# Altium PCB ISL6236A.PcbDoc
Units mm, origin at the board's own origin, x right, y up, seen from the top; angles counter-clockwise.
Board outline 50 x 50 mm, 6 copper layers (L1, L2, L3, L4, L5, L6), stack 0.816 mm thick; 41 components, 27 nets, 119 pads, 102 vias.
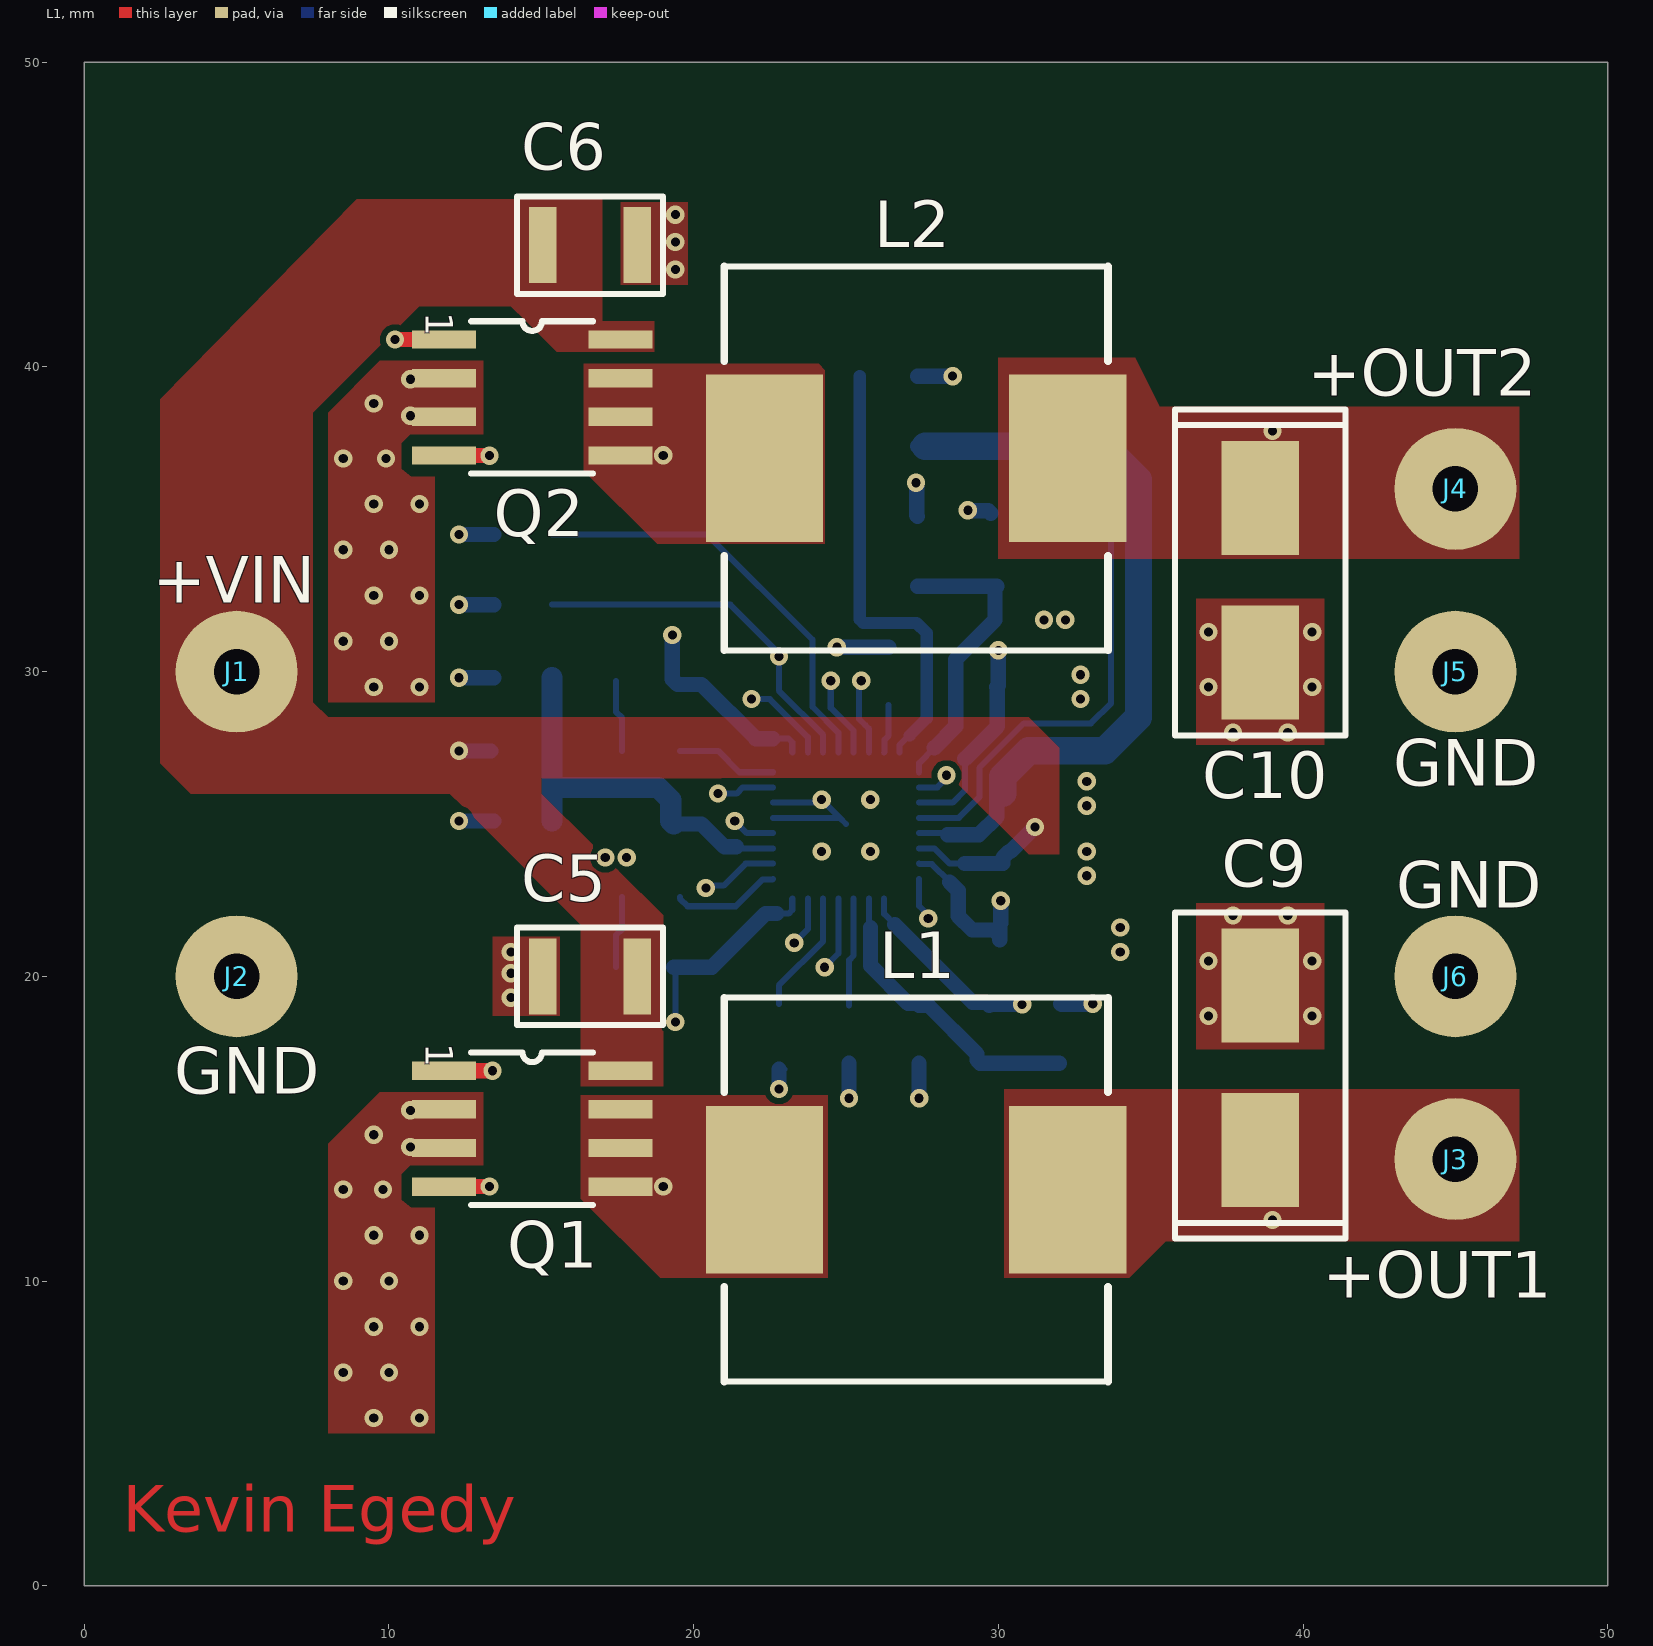
[diagram p0: L1 view]
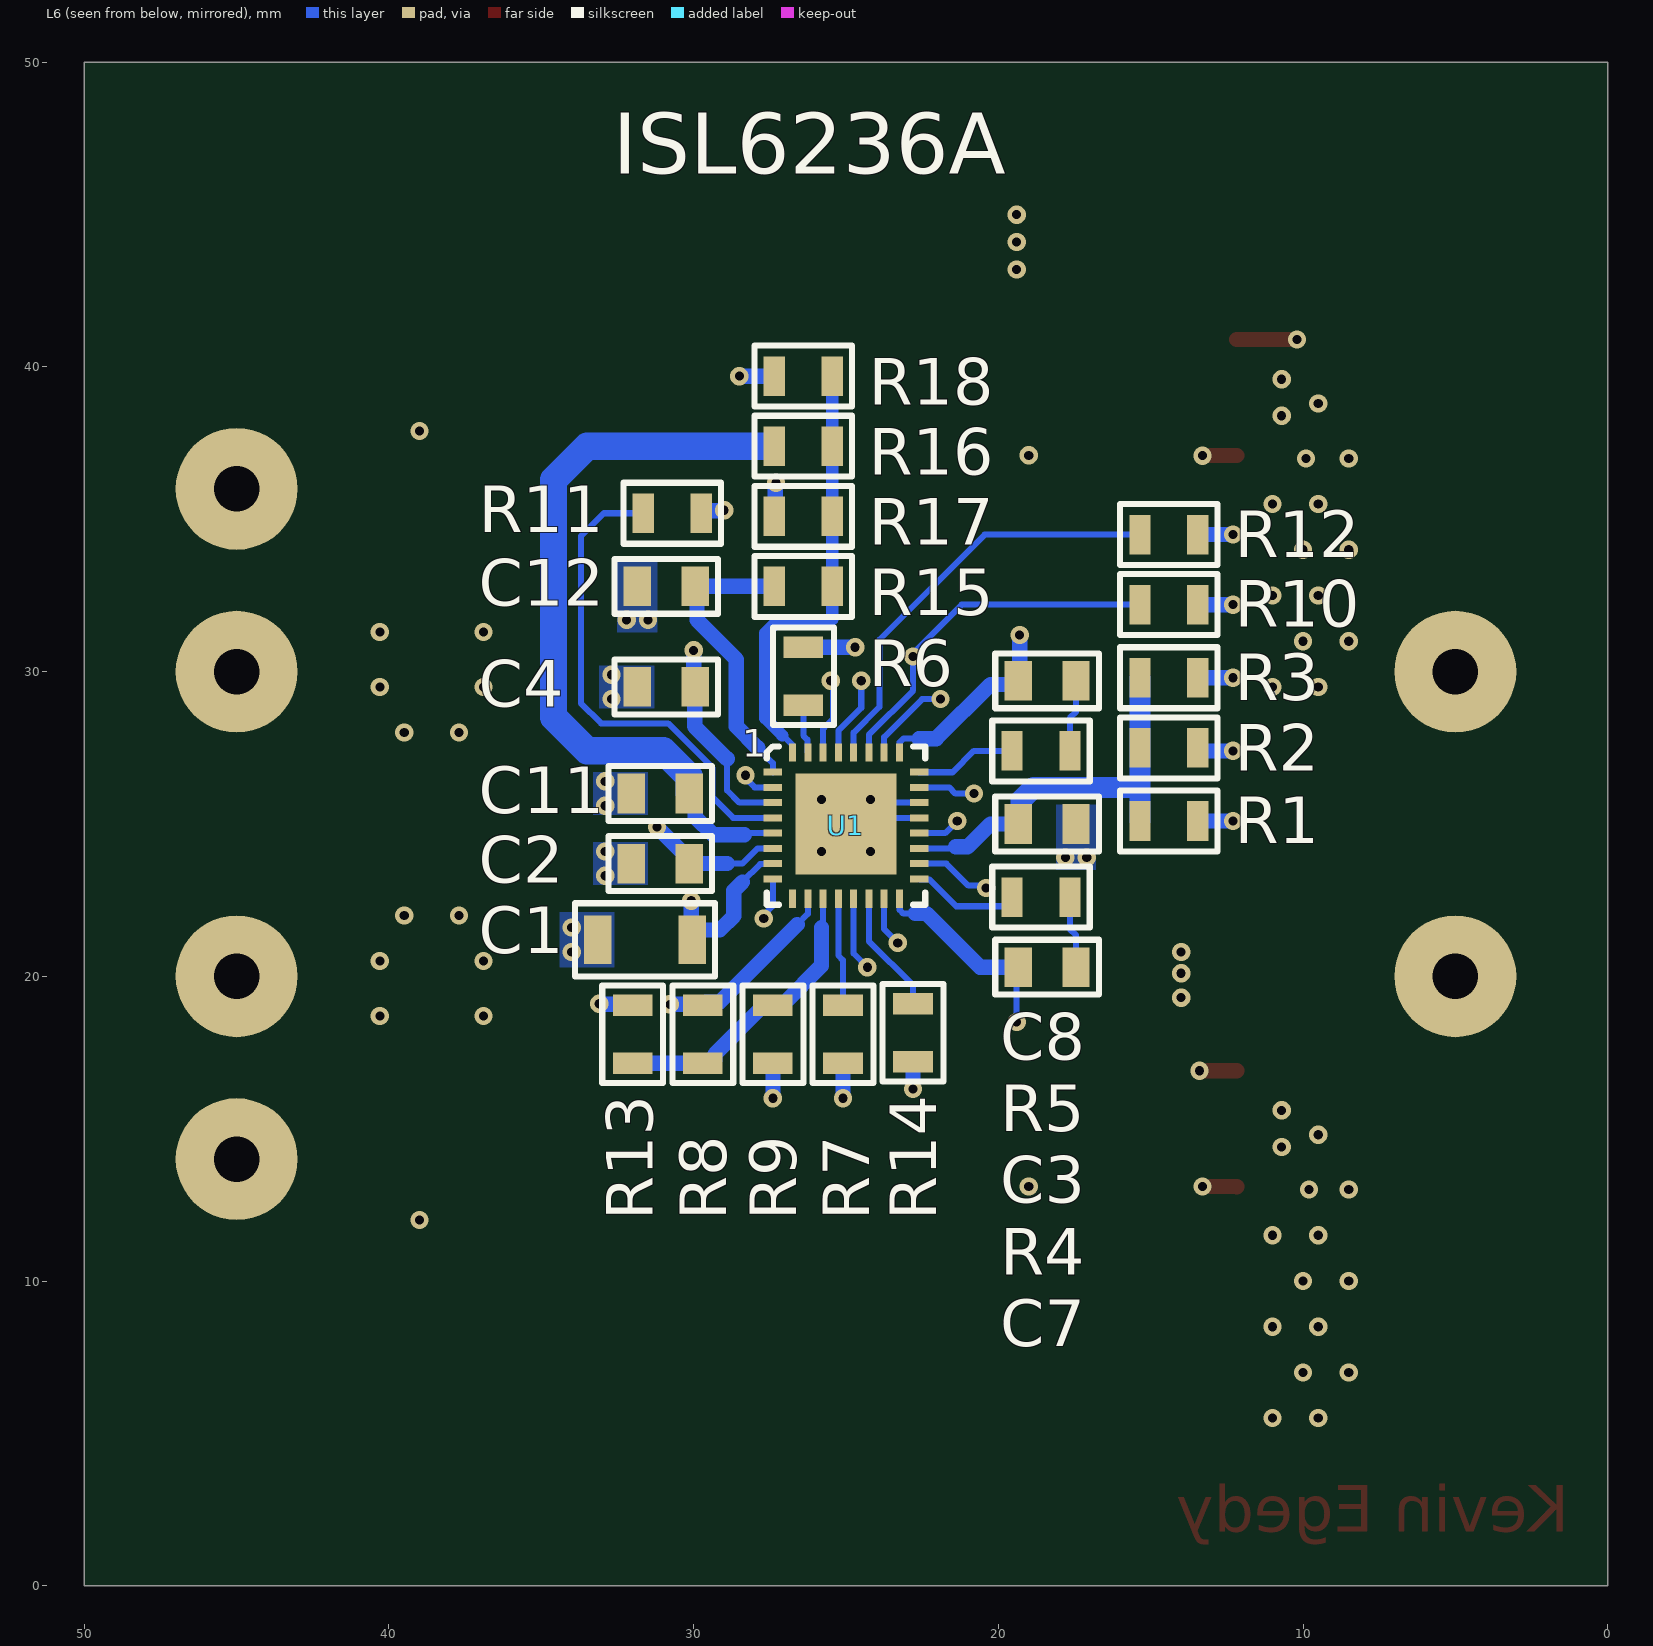
[diagram p1: L6 view, seen from below]
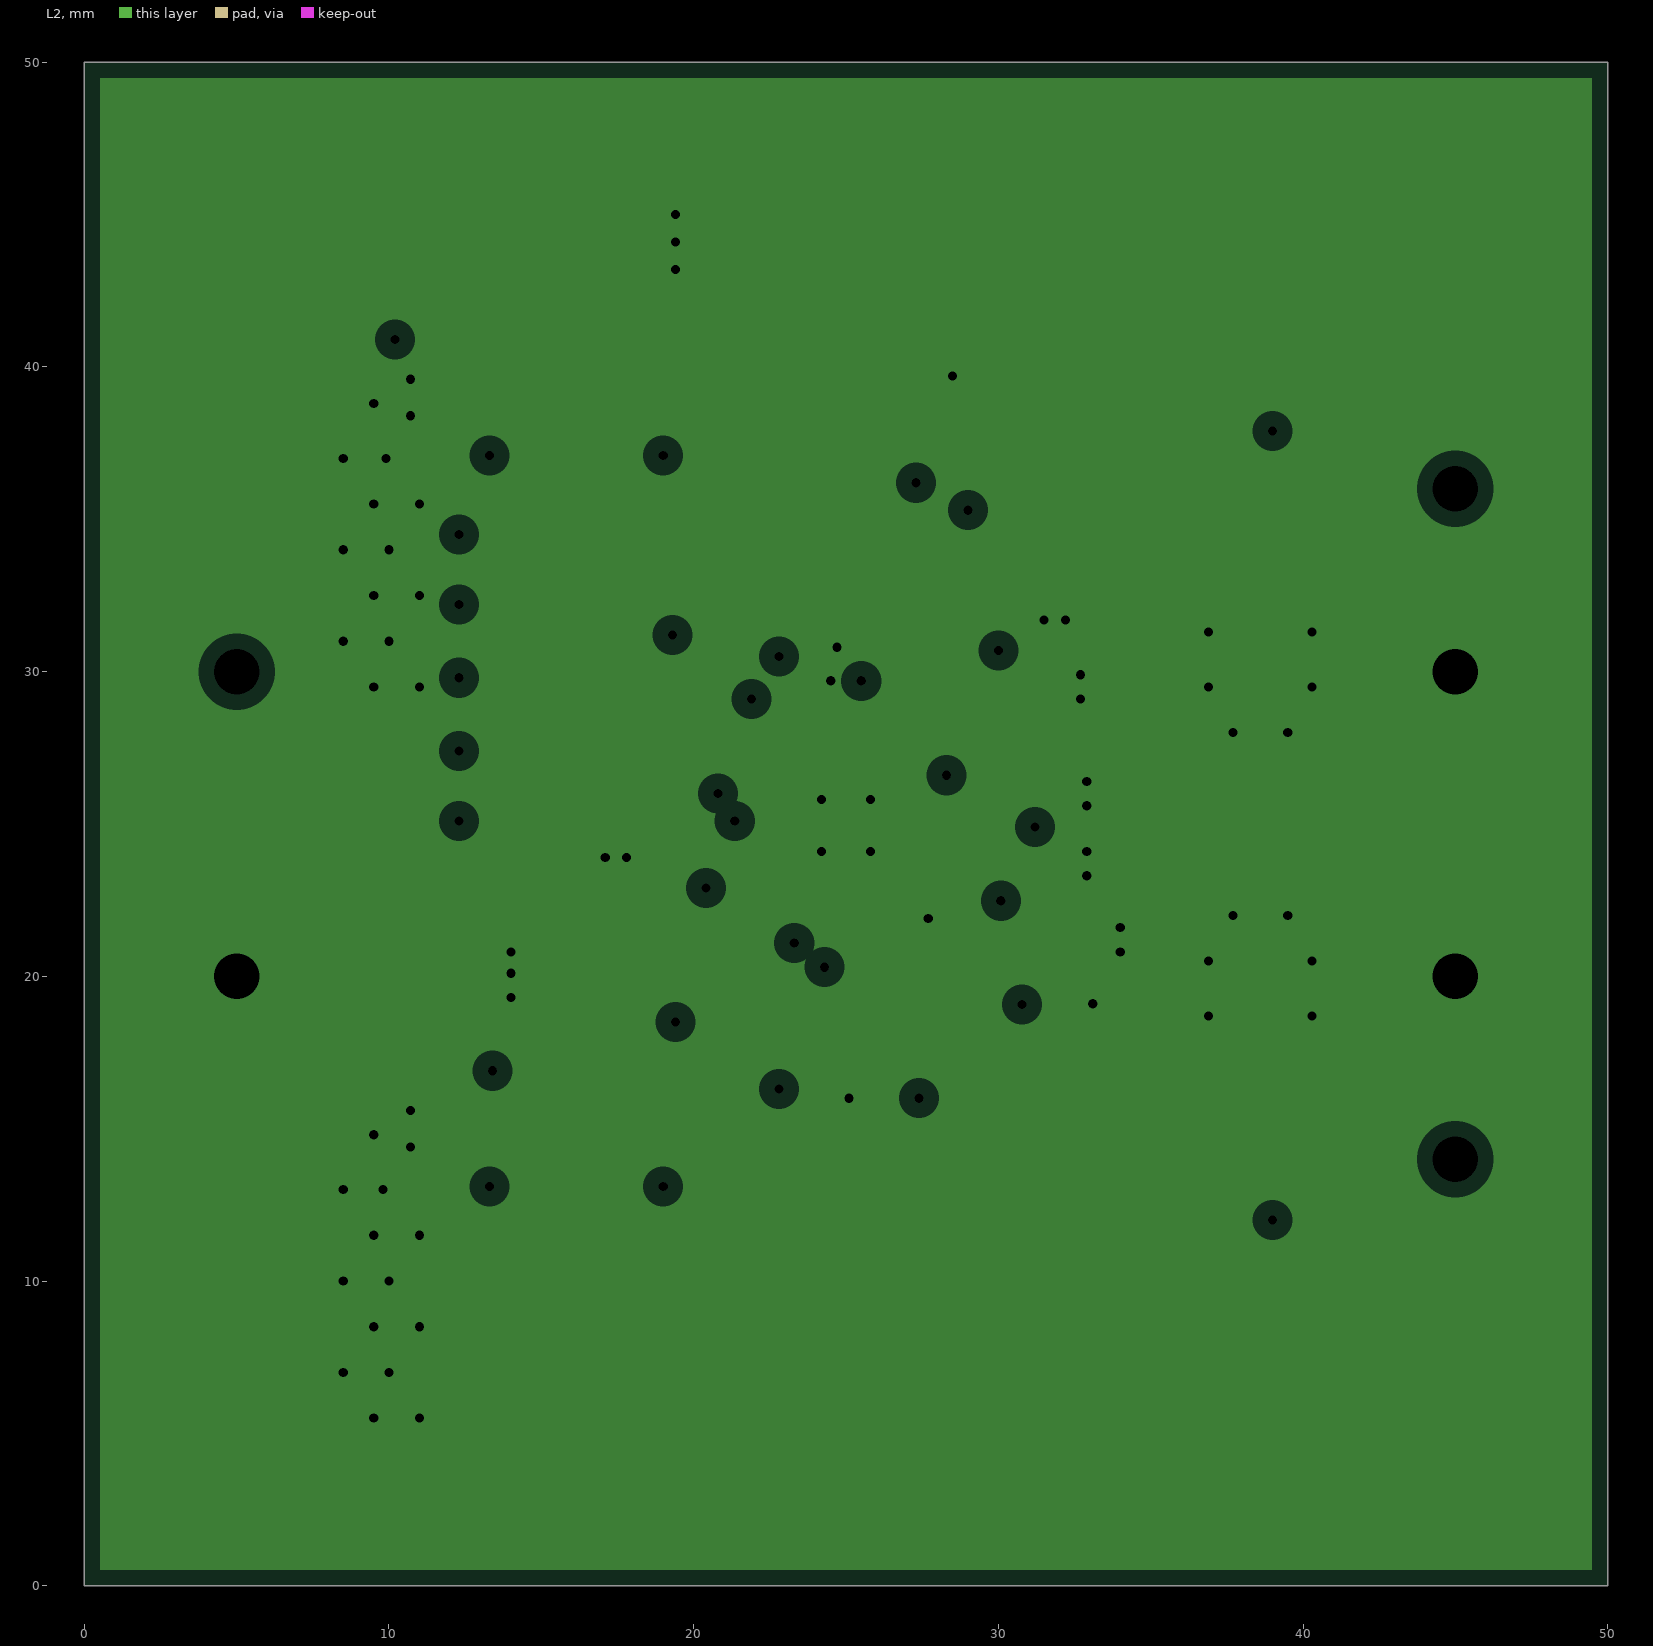
[diagram p2: L2, clearances drawn from the general rule]
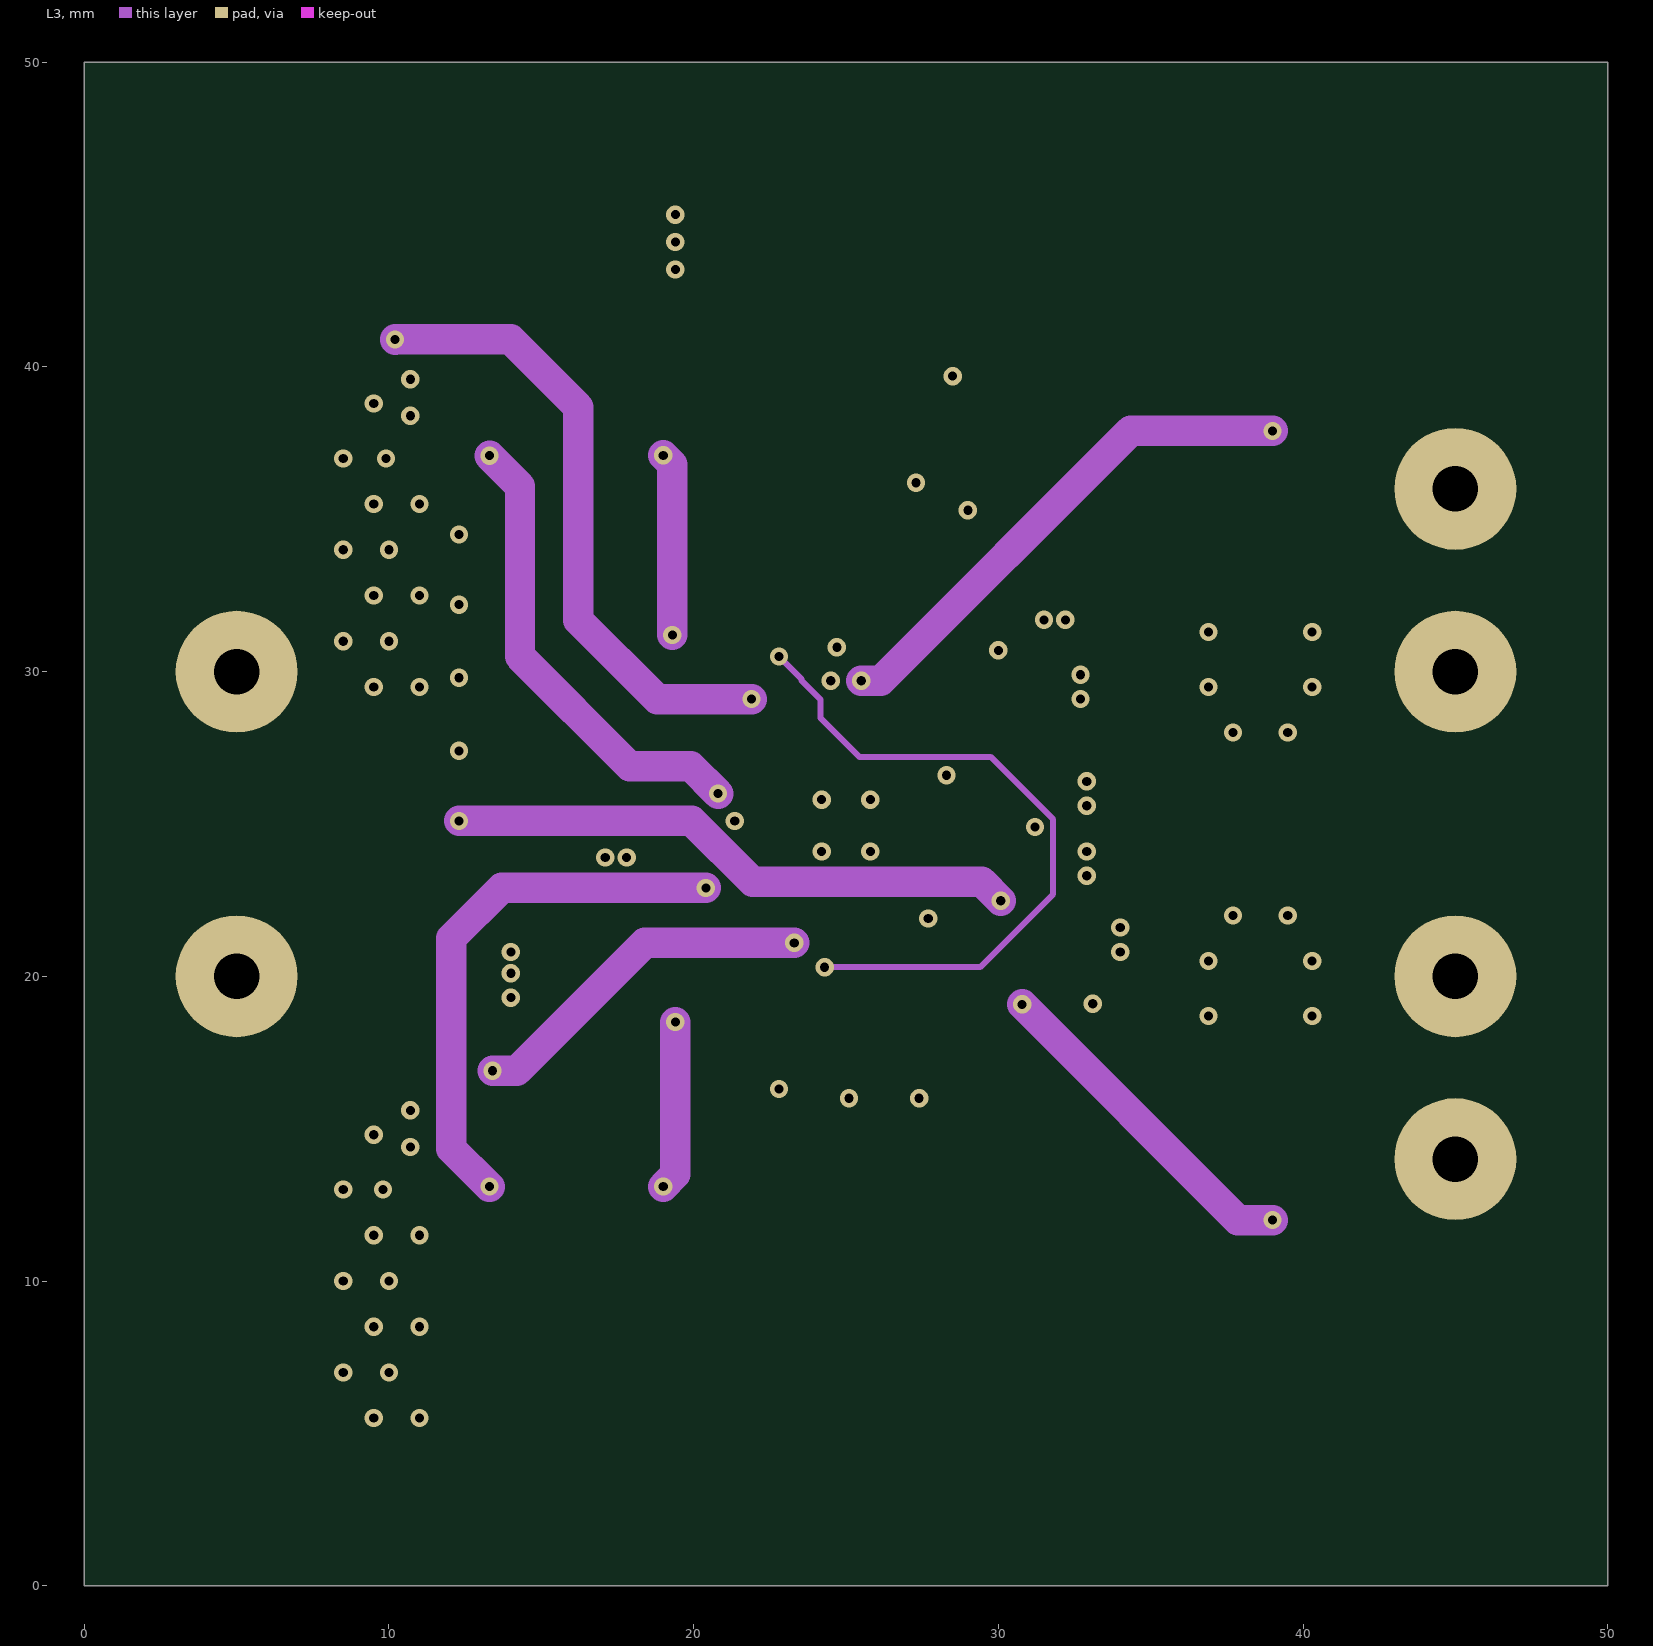
[diagram p3: L3]
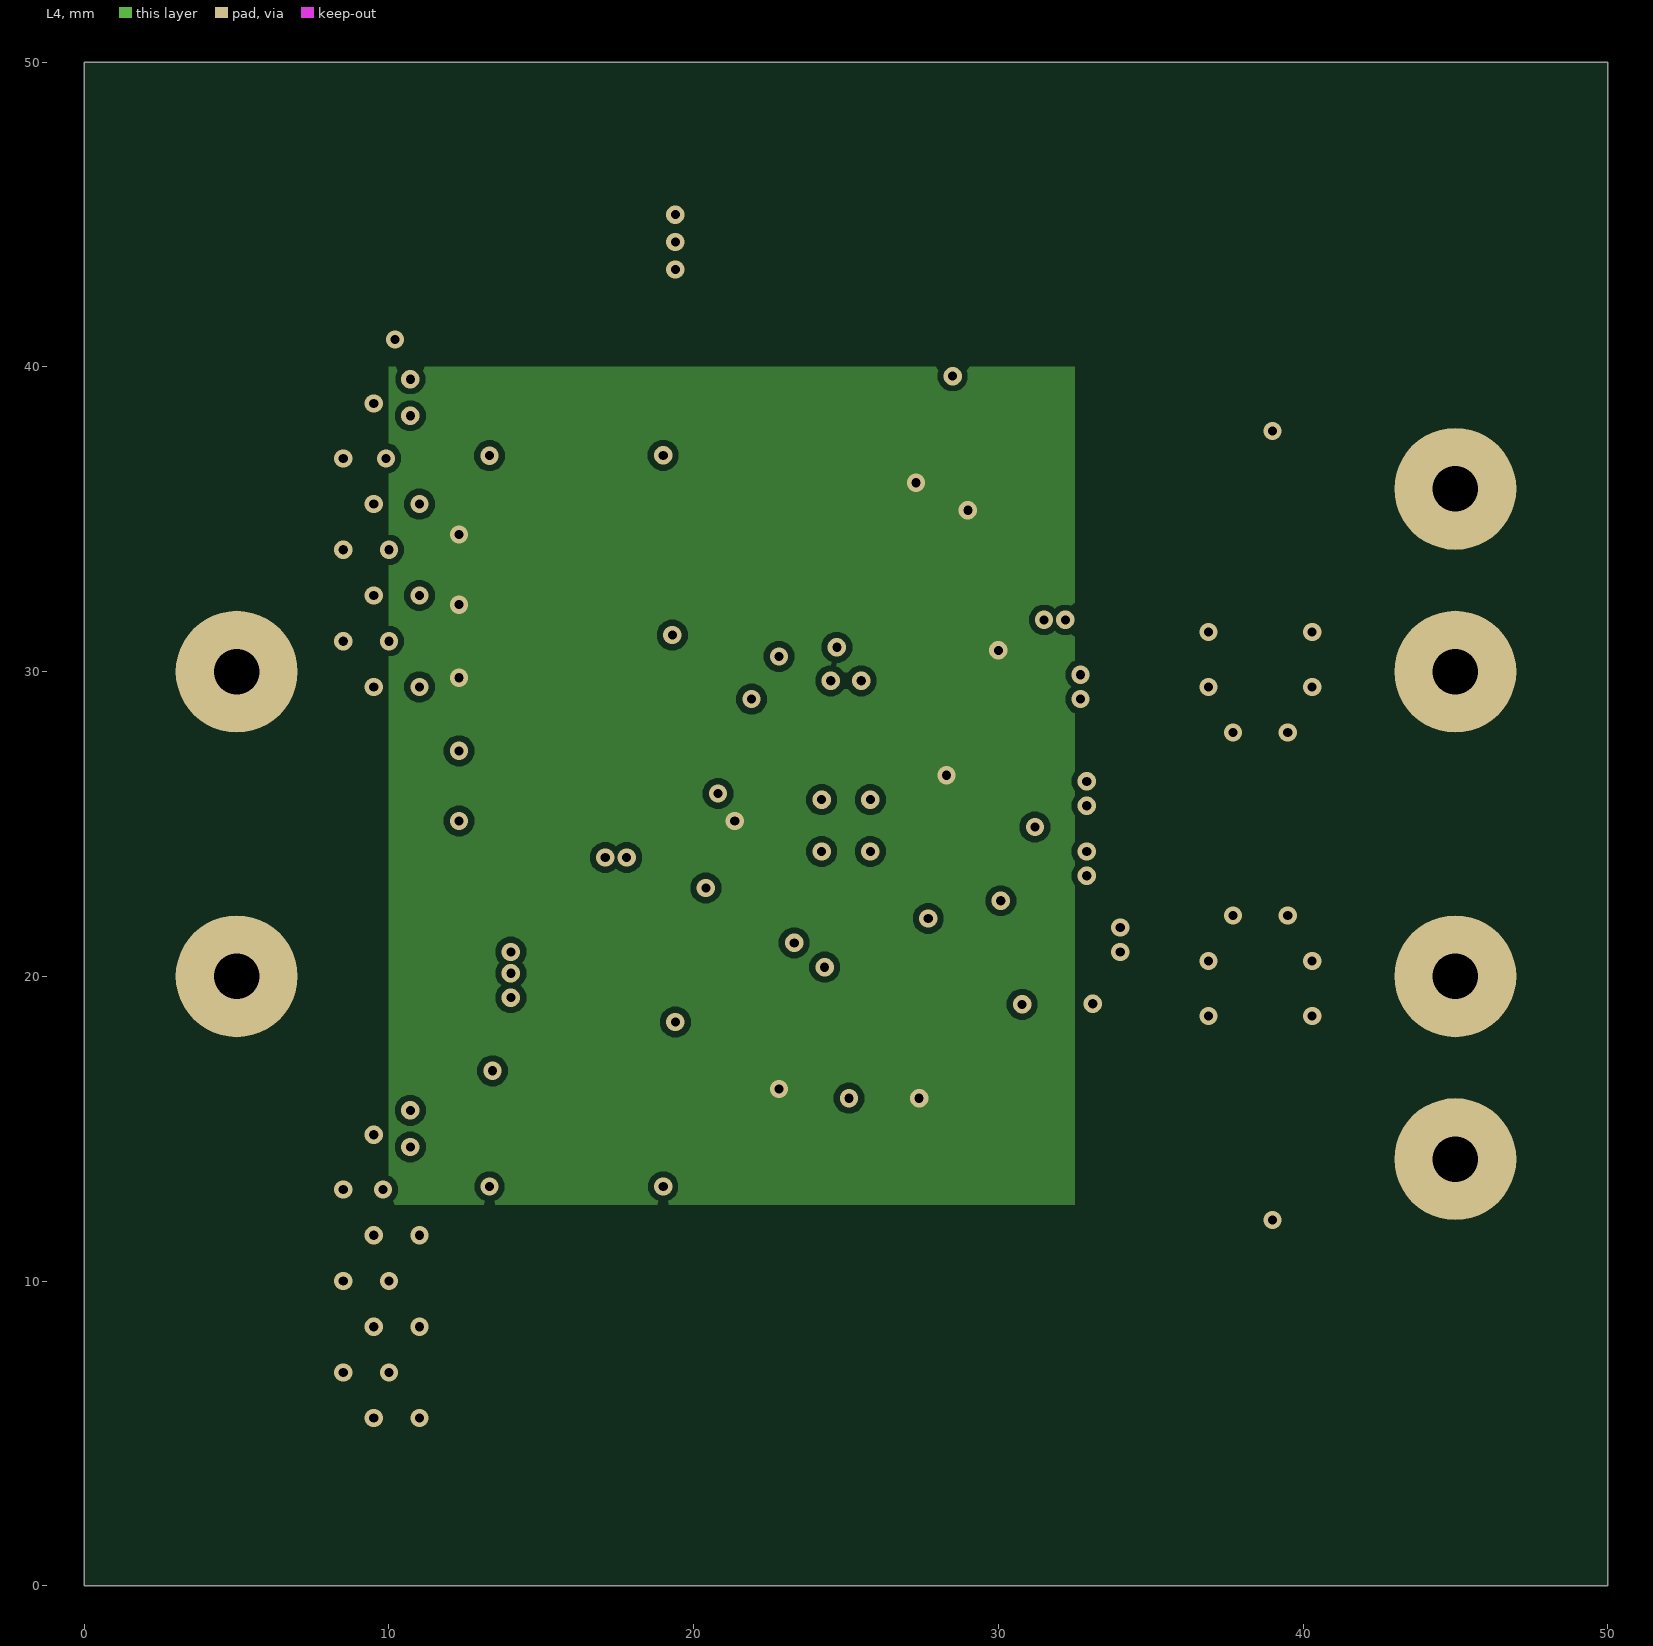
[diagram p4: L4]
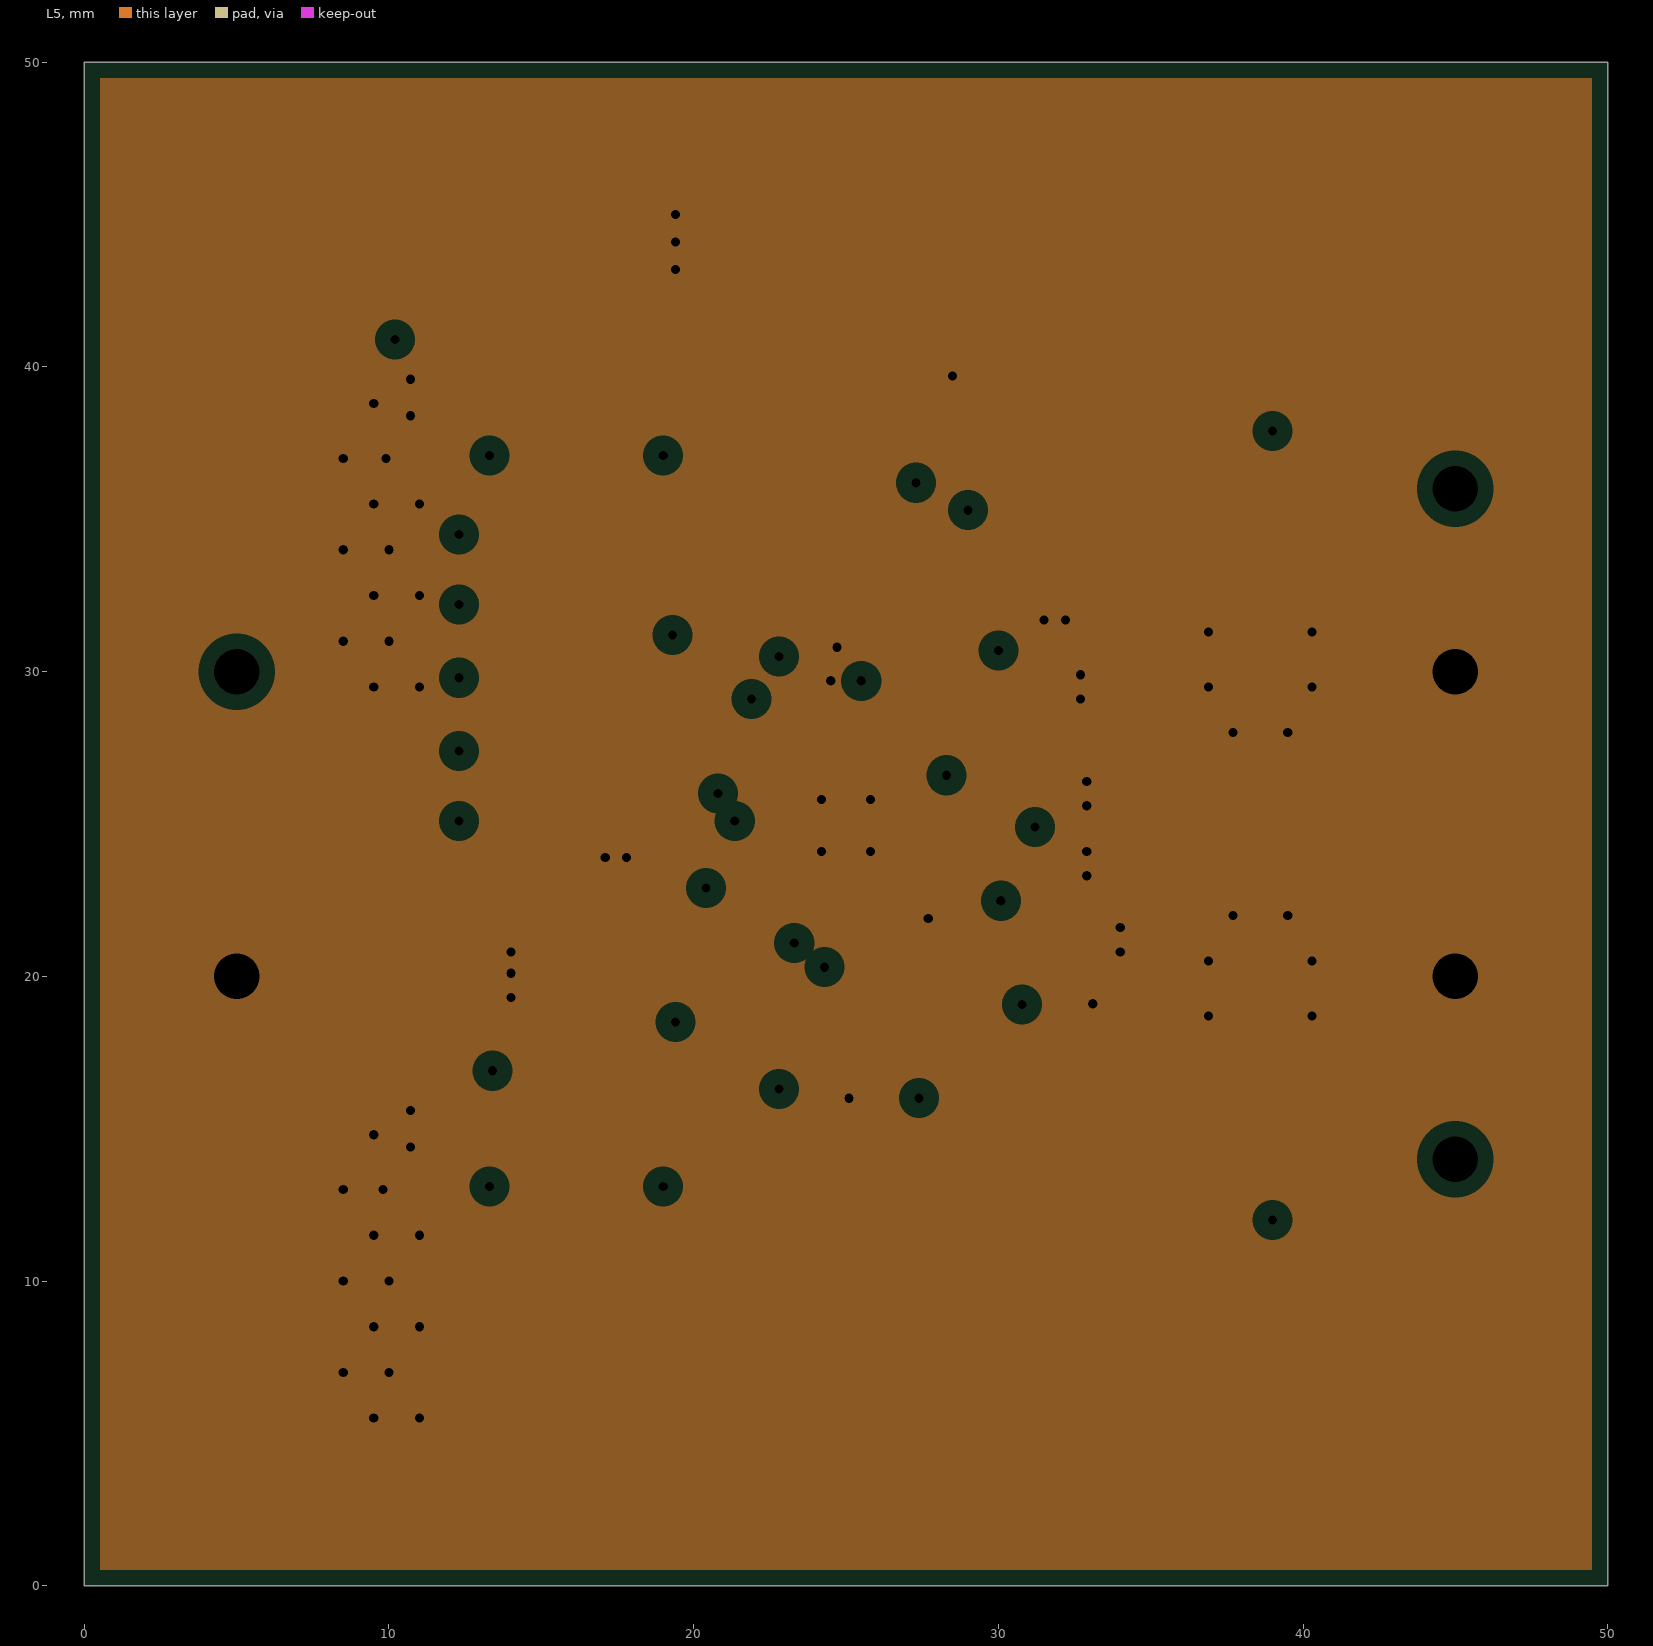
[diagram p5: L5, clearances drawn from the general rule]

## Layer stack, top to bottom
Top Solder: solder mask 0.0102, Solder Resist, Dk 3.5
L1: signal copper 0.0356
Dielectric 2: prepreg 0.0711, PP-006, Dk 4.1
L2: plane copper 0.035, net GND
Dielectric 3: prepreg 0.0711, PP-006, Dk 4.1
L3: signal copper 0.035
Dielectric 5: prepreg 0.0711, PP-006, Dk 4.1
L4: signal copper 0.035
Dielectric 4: prepreg 0.0711, PP-006, Dk 4.1
L5: plane copper 0.035, net GND
Dielectric 1: dielectric 0.32, FR-4, Dk 4.8
L6: signal copper 0.0356
Bottom Solder: solder mask 0.0102, Solder Resist, Dk 3.5

## Board outline
0,0 50,0 50,50 0,50

## Design rules (kind name [scope] priority, off if disabled: settings)
Clearance [All] p1: gap=0.2 ignorepadtopadclearanceinfootprint=FALSE
ComponentClearance [All] p1: gap=0.099 collisioncheckmode=3 verticalgap=0.099 showdistances=FALSE
MinimumSolderMaskSliver [All] p1: minsoldermaskwidth=0.1
PlaneClearance [All] p1: clearance=0.508
PlaneConnect [All] p1: pad.planeconnectstyle=Relief pad.reliefexpansion=0.508 pad.reliefentries=4 pad.reliefconductorwidth=1 pad.reliefairgap=0.5 via.planeconnectstyle=Direct via.reliefexpansion=0.508 via.reliefentries=4 via.reliefconductorwidth=0.254 via.reliefairgap=0.254
PolygonConnect [All] p1: connectstyle=Direct reliefconductorwidth=0.254 reliefentries=4 polygonreliefangle="90 Angle" airgapwidth=0.254
RoutingVias [All] p1: holewidth=0.3 width=0.6 viastyle="Through Hole" minholewidth=0.3 minwidth=0.6 maxholewidth=0.3 maxwidth=0.6
SilkToSolderMaskClearance [IsPad] p1: minsilkscreentomaskgap=0.1 clearancetoexposedcopper=TRUE
SolderMaskExpansion [All] p1: expansion=0.102 istentingtop=FALSE
Width [All] p1: maxlimit=10 minlimit=0.2 preferedwidth=0.2
25 further rules are at their usual default settings.

## Components (designator, comment, footprint, x,y, rotation, side; value= is the part's Value field where it differs from the comment)
C1 "4u7, 50V" C1206 31.6,21.2 r180 bottom
C2 "1uF, 50V" C0805 31.1,23.7 r180 bottom
C3 "1uF, 50V" C0805 18.4,25 r0 bottom
C4 "1uF, 50V" C0805 30.9,29.5 r180 bottom
C5 "10uF, 35V" C1210 16.6,20 r0 top
C6 "10uF, 35V" C1210 16.6,44 r180 top
C7 "100nF" C0805 18.4,20.3 r180 bottom
C8 "220nF" C0805 18.4,29.7 r0 bottom
C9 "330uF, 10V" 7343-43 38.6,17 r90 top
C10 "330uF, 10V" 7343-43 38.6,33 r270 top
C11 "10nF" C0805 31.1,26 r0 bottom
C12 "100nF" C0805 30.9,32.8 r0 bottom
J1 "4MMx1.5MM" PAD_WITH_HOLE_4MMx1MM5 5,30 r0 top
J2 "4MMx1.5MM" PAD_WITH_HOLE_4MMx1MM5 5,20 r0 top
J3 "4MMx1.5MM" PAD_WITH_HOLE_4MMx1MM5 45,14 r0 top
J4 "4MMx1.5MM" PAD_WITH_HOLE_4MMx1MM5 45,36 r0 top
J5 "4MMx1.5MM" PAD_WITH_HOLE_4MMx1MM5 45,30 r0 top
J6 "4MMx1.5MM" PAD_WITH_HOLE_4MMx1MM5 45,20 r0 top
L1 "3u3, DR125-3R3-R" DR125 27.3,13 r180 top
L2 "2u2, DR125-2R2-R" DR125 27.3,37 r0 top
Q1 "SI4816BDY-T1-E3" SO-8 14.7,15 r0 top
Q2 "SI4816BDY-T1-E3" SO-8 14.7,39 r0 top
R1 "0R" R0805 14.4,25.1 r180 bottom
R2 "0R" R0805 14.4,27.5 r0 bottom
R3 "10R" R0805 14.4,29.8 r180 bottom
R4 "1R" R0805 18.6,22.6 r0 bottom
R5 "1R" R0805 18.6,27.4 r180 bottom
R6 "200K" R0805 26.4,29.85 r90 bottom
R7 "200K" R0805 25.1,18.1 r90 bottom
R8 "DNF" R0805 29.7,18.1 r90 bottom
R9 "0R" R0805 27.4,18.1 r270 bottom
R10 "200K" R0805 14.4,32.2 r180 bottom
R11 "10K" R0805 30.7,35.2 r180 bottom
R12 "200K" R0805 14.4,34.5 r180 bottom
R13 "DNF" R0805 32,18.1 r270 bottom
R14 "10K" R0805 22.8,18.15 r270 bottom
R15 "DNF" R0805 26.4,32.8 r0 bottom
R16 "0R" R0805 26.4,37.4 r0 bottom
R17 "DNF" R0805 26.4,35.1 r0 bottom
R18 "DNF" R0805 26.4,39.7 r180 bottom
U1 "ISL6236AIRZ" L32.5x5B 25,24.95 r180 bottom

## Footprints (in the part's own frame and the unit in brackets; to place one, negate y for a bottom-side part, rotate by r counter-clockwise, add the part's x,y. Pads: shape width x height; smd on the part's side, far side on the other; paste and mask are expansions set on the pad)
7343-43 [mm]
  rect 3.75x2.55 smd: 1(-2.7,0) 2(2.7,0)
  silkscreen extent -5.6,-2.8 5.1,2.8
C0805 [mm]
  rect 0.9x1.3 smd: 1(-0.95,0) 2(0.95,0)
  silkscreen extent -1.7,-0.9 1.7,0.9, body extent -1,-0.6 1,0.6, height 1.21
C1206 [mm]
  rect 0.9x1.6 smd: 1(-1.55,0) 2(1.55,0)
  silkscreen extent -2.3,-1.2 2.3,1.2
C1210 [mm]
  rect 0.9x2.5 smd: 1(-1.55,0) 2(1.55,0)
  silkscreen extent -2.4,-1.6 2.4,1.6
DR125 [mm]
  rect 3.85x5.5 smd: 1(-4.975,0) 2(4.975,0)
  silkscreen extent -6.3,-6.3 6.3,6.3
L32.5x5B [mm]
  rect 0.6x0.23 smd mask+0.051: 1(-2.4,1.75) 2(-2.4,1.25) 3(-2.4,0.75) 4(-2.4,0.25) 5(-2.4,-0.25) 6(-2.4,-0.75) 7(-2.4,-1.25) 8(-2.4,-1.75) 17(2.4,-1.75) 18(2.4,-1.25) 19(2.4,-0.75) 20(2.4,-0.25) 21(2.4,0.25) 22(2.4,0.75) 23(2.4,1.25) 24(2.4,1.75)
  rect 0.23x0.6 smd mask+0.051: 9(-1.75,-2.4) 10(-1.25,-2.4) 11(-0.75,-2.4) 12(-0.25,-2.4) 13(0.25,-2.4) 14(0.75,-2.4) 15(1.25,-2.4) 16(1.75,-2.4) 25(1.75,2.4) 26(1.25,2.4) 27(0.75,2.4) 28(0.25,2.4) 29(-0.25,2.4) 30(-0.75,2.4) 31(-1.25,2.4) 32(-1.75,2.4)
  rect 3.3x3.3 smd mask+0.051: 33(0,0.05)
  silkscreen extent -2.6,-2.6 2.6,2.6
PAD_WITH_HOLE_4MMx1MM5 [mm]
  round 4 hole 1.5: 1(0,0)
R0805 [mm]
  rect 0.7x1.3 smd: 1(-0.95,0) 2(0.95,0)
  silkscreen extent -1.6,-1 1.6,1
SO-8 [mm]
  rect 2.1x0.6 smd: 1(-2.9,1.905) 2(-2.9,0.635) 3(-2.9,-0.635) 4(-2.9,-1.905) 5(2.9,-1.905) 6(2.9,-0.635) 7(2.9,0.635) 8(2.9,1.905)
  silkscreen extent -2,-2.5 2,2.5

## Part data
C1: library part C3216X5R1H475K160AB, "C Series 1206 4.7 uF 50 V ±10 % Tolerance X5R SMT Multilayer Ceramic Capacitor", Capacitance=4.7uF, Case Code (Imperial)=1206, Case Code (Metric)=3216, Dielectric=X5R, Dielectric Material=Ceramic, Manufacturer=TDK, Max Operating Temperature=85°C, Min Operating Temperature=-55°C, Package Quantity=1, Supplier Part Number 1=445-5994-1-ND, Tolerance=10%, Voltage Rating=50V, Case/Package=1206, Category="Ceramic Capacitors", ComponentLink1Description=https://datasheet.ciiva.com/24216/c3216x5r1h475k160ab-265269-24216325.pdf?src-supplier=Mouser, ComponentLink1URL=https://datasheet.ciiva.com/24216/c3216x5r1h475k160ab-265269-24216325.pdf?src-supplier=Mouser, ComponentLink2Description=https://datasheet.ciiva.com/6286/tdkmlcccaprange-6286230.pdf?src-supplier=Digi-Key, ComponentLink2URL=https://datasheet.ciiva.com/6286/tdkmlcccaprange-6286230.pdf?src-supplier=Digi-Key, ComponentLink3Description=https://datasheet.ciiva.com/6286/tdkmlcccaprange-6286233.pdf?src-supplier=Digi-Key, ComponentLink3URL=https://datasheet.ciiva.com/6286/tdkmlcccaprange-6286233.pdf?src-supplier=Digi-Key, ComponentLink4Description=https://datasheet.ciiva.com/6286/tdkmlcccaprange-6286236.pdf?src-supplier=Digi-Key, ComponentLink4URL=https://datasheet.ciiva.com/6286/tdkmlcccaprange-6286236.pdf?src-supplier=Digi-Key, Construction=Flat, Depth=1.6mm, Height=1.6mm, Lead Free="Lead Free", Length=3.2mm, Manufacturer Part Number=C3216X5R1H475K160AB, Mount="Surface Mount", Packaging="Tape and Reel", Pricing 1="1=0.82000, 10=0.60400, 50=0.48300, 100=0.41400, 500=0.32776, 1000=0.27600 (USD)", Resistor Type=Ceramic, RoHS=Yes, RoHS Compliant=Yes, Series=C, Stock 1=10961, Supplier 1=Digi-Key, Termination=SMD/SMT, Thickness=0.071inch, Voltage Rating (DC)=50V, Weight=0.000571oz, Width=1.6mm
C2 C3 C4: library part C0805C105K5RACTU, "0805 C 1uF Ceramic Multilayer Capacitor; 50 V; +125degC; X7R Dielectric; +/-10%", Capacitance=1uF, Case Code (Imperial)=0805, Case Code (Metric)=2012, Dielectric=X7R, Dielectric Material=Ceramic, Manufacturer=KEMET, Max Operating Temperature=125°C, Min Operating Temperature=-55°C, Package Quantity=1, Supplier Part Number 1=399-7409-1-ND, Tolerance=10%, Voltage=50V, Case/Package=0805, Category="Ceramic Capacitors", ComponentLink1Description=https://datasheet.ciiva.com/7842/1732744-7842192.pdf?src-supplier=Element14, ComponentLink1URL=https://datasheet.ciiva.com/7842/1732744-7842192.pdf?src-supplier=Element14, ComponentLink2Description=https://datasheet.ciiva.com/5408/kem-c1002-x7r-smd-5408569.pdf?src-supplier=Mouser, ComponentLink2URL=https://datasheet.ciiva.com/5408/kem-c1002-x7r-smd-5408569.pdf?src-supplier=Mouser, ComponentLink3Description=https://datasheet.ciiva.com/22700/1851736-22700523.pdf?src-supplier=Element14, ComponentLink3URL=https://datasheet.ciiva.com/22700/1851736-22700523.pdf?src-supplier=Element14, Construction=Flat, Contact Plating=Tin,Matte, Depth=1.25mm, Height=1.25mm, Length=2mm, Manufacturer Part Number=C0805C105K5RACTU, Mount="Surface Mount,PCB", Packaging="Tape and Reel", Pricing 1="1=0.36000, 10=0.25200, 50=0.17620, 100=0.15110, 500=0.11334, 1000=0.09570 (USD)", REACH SVHC="No SVHC", RoHS=Yes, RoHS Compliant=Yes, Series=C, Supplier 1=Digi-Key, Termination=SMD/SMT, Thickness=0.055inch, Voltage Rating=50V, Voltage Rating (DC)=50V, Width=0.049inch
C5 C6: library part C1210C106K6PACTU, "KEMET - C1210C106K6PACTU - SMD Multilayer Ceramic Capacitor, 10 &#181;F, 35 V, 1210 [3225 Metric], &#177; 10%, X5R, C Series KEMET", Capacitance=10uF, Case Code (Imperial)=1210, Case Code (Metric)=3225, Dielectric=X5R, Dielectric Material=Ceramic, Manufacturer=KEMET, Max Operating Temperature=85°C, Min Operating Temperature=-55°C, Supplier Part Number 1=399-12070-1-ND, Tolerance=10%, Voltage=35V, Case/Package=1210, Category="Ceramic Capacitors", ComponentLink1Description=http://www.farnell.com/datasheets/2741192.pdf?src-supplier=Farnell, ComponentLink1URL=http://www.farnell.com/datasheets/2741192.pdf?src-supplier=Farnell, ComponentLink2Description=http://www.alliedelec.com/m/d/f3c02ddb98afa3dd1adcb801109671e9.pdf?src-supplier=Allied+Electronics, ComponentLink2URL=http://www.alliedelec.com/m/d/f3c02ddb98afa3dd1adcb801109671e9.pdf?src-supplier=Allied+Electronics, ComponentLink3Description=https://api.kemet.com/component-edge/download/datasheet/C1210C106K6PAC7800.pdf?src-supplier=Digi-Key, ComponentLink3URL=https://api.kemet.com/component-edge/download/datasheet/C1210C106K6PAC7800.pdf?src-supplier=Digi-Key, ComponentLink4Description=http://www.kemet.com/docfinder?Partnumber=C1210C106K6PAC7800&src-supplier=Digi-Key, ComponentLink4URL=http://www.kemet.com/docfinder?Partnumber=C1210C106K6PAC7800&src-supplier=Digi-Key, ComponentLink5Description=http://www.farnell.com/datasheets/2741192.pdf?src-supplier=Newark, ComponentLink5URL=http://www.farnell.com/datasheets/2741192.pdf?src-supplier=Newark, Depth=2.5mm, Dissipation Factor=2.5%, Height=1.9mm, Lead Free="Lead Free", Length=0.126inch, Manufacturer Part Number=C1210C106K6PACTU, Mount="Surface Mount", Packaging="Tape and Reel", Pricing 1="1=0.74000, 10=0.54900, 50=0.43880, 100=0.37620, 500=0.29782, 1000=0.25079 (USD)", RoHS=Yes, RoHS Compliant=Yes, Supplier 1=Digi-Key, Termination=Solder, Thickness=0.083inch, Voltage Rating=35V, Voltage Rating (DC)=35V, Width=0.098inch
C7 C12: library part C0805C104K5RACTU, "Cap Ceramic 0.1uF 50V X7R 10% SMD 2.0 x 1.2 mm 125 C Paper T/R", Case Code (Imperial)=0805, Case Code (Metric)=2012, Dielectric=X7R, Dielectric Material=Ceramic, Manufacturer=KEMET, Max Operating Temperature=125°C, Min Operating Temperature=-55°C, Package Quantity=4000, Supplier Part Number 1=399-1170-1-ND, Tolerance=10%, Voltage=500V, Voltage Rating=50V, Capacitance=100nF, Case/Package=0805, Category="Ceramic Capacitors", ComponentLink1Description=https://datasheet.ciiva.com/32431/slceramic-chip-condensers-e-32431755.pdf?src-supplier=Distrelec, ComponentLink1URL=https://datasheet.ciiva.com/32431/slceramic-chip-condensers-e-32431755.pdf?src-supplier=Distrelec, ComponentLink2Description=https://datasheet.ciiva.com/28682/1851736-28682232.pdf?src-supplier=Element14, ComponentLink2URL=https://datasheet.ciiva.com/28682/1851736-28682232.pdf?src-supplier=Element14, ComponentLink3Description=https://datasheet.ciiva.com/18410/70095383-18410815.pdf?src-supplier=Allied+Electronics, ComponentLink3URL=https://datasheet.ciiva.com/18410/70095383-18410815.pdf?src-supplier=Allied+Electronics, ComponentLink4Description=https://datasheet.ciiva.com/14589/70095383-14589048.pdf?src-supplier=Allied+Electronics, ComponentLink4URL=https://datasheet.ciiva.com/14589/70095383-14589048.pdf?src-supplier=Allied+Electronics, Construction=Flat, Contact Plating=Tin,Matte, Depth=1.25mm, Height=0.9mm, Lead Pitch=0.75mm, Length=2mm, Manufacturer Part Number=C0805C104K5RACTU, Mount="Surface Mount,PCB", Number of Pins=2, Packaging="Tape and Reel", Pricing 1="1=0.15000, 10=0.11000, 50=0.06220, 100=0.05150, 500=0.03612, 1000=0.02991 (USD)", Radiation Hardening=No, REACH SVHC="No SVHC", RoHS=Yes, RoHS Compliant=Yes, Series=C0805C, Stock 1=4000, Supplier 1=Digi-Key, Termination=SMD/SMT, Thickness=0.035inch, Voltage Rating (DC)=50V, Width=1.2mm
C8: library part C0805C224K5RACTU, "CAP CER 0.22UF 50V X7R 0805", Case Code (Imperial)=0805, Case Code (Metric)=2012, Dielectric=X7R, Dielectric Material=Ceramic, Manufacturer=KEMET, Max Operating Temperature=125°C, Min Operating Temperature=-55°C, Package Quantity=1, Supplier Part Number 1=399-3491-2-ND, Tolerance=10%, Voltage=50V, Capacitance=220nF, Case/Package=0805, Category="Ceramic Capacitors", ComponentLink1Description=https://datasheet.ciiva.com/18193/getdatasheetpartid-304413-18193686.pdf?src-supplier=Verical, ComponentLink1URL=https://datasheet.ciiva.com/18193/getdatasheetpartid-304413-18193686.pdf?src-supplier=Verical, ComponentLink2Description=https://datasheet.ciiva.com/14589/70095383-14589519.pdf?src-supplier=Allied+Electronics, ComponentLink2URL=https://datasheet.ciiva.com/14589/70095383-14589519.pdf?src-supplier=Allied+Electronics, ComponentLink3Description=https://datasheet.ciiva.com/14603/70095383-14603247.pdf?src-supplier=Allied+Electronics, ComponentLink3URL=https://datasheet.ciiva.com/14603/70095383-14603247.pdf?src-supplier=Allied+Electronics, ComponentLink4Description=https://datasheet.ciiva.com/7842/kem-c1002-x7r-smd-7842582.pdf?src-supplier=Element14, ComponentLink4URL=https://datasheet.ciiva.com/7842/kem-c1002-x7r-smd-7842582.pdf?src-supplier=Element14, ComponentLink5Description=https://datasheet.ciiva.com/28682/1851736-28682316.pdf?src-supplier=Element14, ComponentLink5URL=https://datasheet.ciiva.com/28682/1851736-28682316.pdf?src-supplier=Element14, Construction=Flat, Depth=1.25mm, Dissipation Factor=2.5%, Height=1.1mm, Lead Pitch=0.75mm, Length=2mm, Manufacturer Part Number=C0805C224K5RACTU, Mount="Surface Mount,PCB", Packaging="Tape and Reel", Pricing 1="2500=0.03216 (USD)", Radiation Hardening=No, REACH SVHC="No SVHC", RoHS=Yes, RoHS Compliant=Yes, Series=C, Supplier 1=Digi-Key, Termination=SMD/SMT, Thickness=0.055inch, Voltage Rating=50V, Voltage Rating (DC)=50V, Width=0.049inch
C9 C10: library part T530X337M010ATE004, "Cap Tant Organic 330uF 10VDC X CASE 20% (7.3 X 4.3 X 4mm) SMD 7343-43 0.004 Ohm 125C T/R", Capacitance=330uF, Case Code (Imperial)=2917, Case Code (Metric)=7343, ESR (Equivalent Series Resistance)=4mR, Leakage Current=330uA, Manufacturer=KEMET, Max Operating Temperature=125°C, Min Operating Temperature=-55°C, Package Quantity=500, Ripple Current=8.2A, Supplier Part Number 1=399-10378-1-ND, Tolerance=20%, Voltage=10V, Case/Package=2917, Category="Polymer Capacitors", ComponentLink1Description=https://datasheet.ciiva.com/11794/0900766b80deaa91-11794477.pdf?src-supplier=RSComponents, ComponentLink1URL=https://datasheet.ciiva.com/11794/0900766b80deaa91-11794477.pdf?src-supplier=RSComponents, ComponentLink2Description=https://datasheet.ciiva.com/14593/70096008-14593753.pdf?src-supplier=Allied+Electronics, ComponentLink2URL=https://datasheet.ciiva.com/14593/70096008-14593753.pdf?src-supplier=Allied+Electronics, Construction=Flat, Depth=4.3mm, Dissipation Factor=8%, Features="General Purpose", Height=4mm, Height - Seated (Max)=0.169inch, Length=7.3mm, Life (Hours)=2000Hour, Manufacturer Part Number=T530X337M010ATE004, Mount="Surface Mount,PCB", Packaging="Tape and Reel", Polarity=Polar, Pricing 1="1=7.14000, 10=6.34700, 50=5.55360, 100=5.07760 (USD)", REACH SVHC="No SVHC", RoHS=Yes, RoHS Compliant=Yes, Series=T530, Stock 1=3, Supplier 1=Digi-Key, Termination=SMD/SMT, Voltage Rating=10V, Voltage Rating (DC)=10V, Width=4.3mm
C11: library part C0805F103K5RACTU, "KEMET - C0805F103K5RACTU - SMD Multilayer Ceramic Capacitor, FO-CAP, 10000 pF, 50 V, 0805 [2012 Metric], ± 10%, X7R", Case Code (Imperial)=0805, Case Code (Metric)=2012, Dielectric=X7R, Dielectric Material=Ceramic, Manufacturer=KEMET, Max Operating Temperature=125°C, Min Operating Temperature=-55°C, Package Quantity=4000, Supplier Part Number 1=399-5107-1-ND, Tolerance=10%, Voltage=50V, Capacitance=10nF, Case/Package=0805, Category="Ceramic Capacitors", ComponentLink1Description=https://datasheet.ciiva.com/146/docfinderpartnumber-c0805f103k5ractu-146278.pdf?src-supplier=Digi-Key, ComponentLink1URL=https://datasheet.ciiva.com/146/docfinderpartnumber-c0805f103k5ractu-146278.pdf?src-supplier=Digi-Key, ComponentLink2Description=https://datasheet.ciiva.com/7842/48829-7842407.pdf?src-supplier=Element14, ComponentLink2URL=https://datasheet.ciiva.com/7842/48829-7842407.pdf?src-supplier=Element14, ComponentLink3Description=https://datasheet.ciiva.com/7842/48829-7842408.pdf?src-supplier=Element14, ComponentLink3URL=https://datasheet.ciiva.com/7842/48829-7842408.pdf?src-supplier=Element14, Construction=Flat, Depth=1.25mm, Height=0.9mm, Lead Pitch=0.75mm, Length=2mm, Manufacturer Part Number=C0805F103K5RACTU, Mount="Surface Mount", Number of Pins=2, Packaging="Tape and Reel", Pricing 1="1=0.38000, 10=0.25800, 50=0.17200, 100=0.14620, 500=0.10322, 1000=0.09032 (USD)", Radiation Hardening=No, REACH SVHC="No SVHC", RoHS=Yes, RoHS Compliant=Yes, Series=FO-CAP, Stock 1=81291, Supplier 1=Digi-Key, Termination=SMD/SMT, Thickness=0.039inch, Voltage Rating=50V, Voltage Rating (DC)=50V, Width=1.25mm
J1 J2 J3 J4 J5 J6: library part PAD_WITH_HOLE_4MMx1MM5, "Pad with a hole 4mm x 1.5mm"
L1: library part DR125-3R3-R, "General Purpose Inductor, 3.3uH, 20%, 1 Element, Ferrite-Core, SMD, 4949", Case/Package=Nonstandard, Current Rating=9.26A, DC Resistance (DCR)=6.3mR, Inductance=3.3uH, Inductance Tolerance=20%, Manufacturer="Eaton Cooper", Max Operating Temperature=125°C, Min Operating Temperature=-40°C, Package Quantity=600, Resistor Type=Wirewound, Saturation Current=12.7A, Self Resonant Frequency=100kHz, Supplier Part Number 1=513-1529-1-ND, Category="Fixed Inductors", ComponentLink1Description=https://datasheet.ciiva.com/26858/getdatasheetpartid-251124-26858392.pdf?src-supplier=Verical, ComponentLink1URL=https://datasheet.ciiva.com/26858/getdatasheetpartid-251124-26858392.pdf?src-supplier=Verical, ComponentLink2Description=https://datasheet.ciiva.com/5707/87246-5707962.pdf?src-supplier=Farnell, ComponentLink2URL=https://datasheet.ciiva.com/5707/87246-5707962.pdf?src-supplier=Farnell, ComponentLink3Description=https://datasheet.ciiva.com/30081/4a32919a-7470-4ae0-be45-b59e3a1351ef-30081146.pdf?src-supplier=Onlinecomponents.com, ComponentLink3URL=https://datasheet.ciiva.com/30081/4a32919a-7470-4ae0-be45-b59e3a1351ef-30081146.pdf?src-supplier=Onlinecomponents.com, ComponentLink4Description=https://datasheet.ciiva.com/16295/bus-elx-ds-4315-dr-series-16295562.pdf?src-supplier=Future+Electronics, ComponentLink4URL=https://datasheet.ciiva.com/16295/bus-elx-ds-4315-dr-series-16295562.pdf?src-supplier=Future+Electronics, Core Material=Ferrite, Depth=12.5mm, Height=6mm, Height - Seated (Max)=0.236inch, Length=12.5mm, Manufacturer Part Number=DR125-3R3-R, Max DC Current=9.26A, Military Standard=Not, Mount="Surface Mount", Number of Pins=2, Packaging="Tape and Reel", Pricing 1="1=1.46000, 10=1.35100, 25=1.24720, 50=1.03960, 100=0.97710, 250=0.87320 (USD)", Radiation Hardening=No, Rated Current-Max=9.26A, REACH SVHC="No SVHC", RMS Current (Irms)=9.26A, RoHS=Yes, Series=DR, Shielding=Shielded, Stock 1=3099, Supplier 1=Digi-Key, Termination=SMD/SMT, Test Frequency=100kHz, Tolerance=20%, Weight=0.144oz, Width=0.492inch
L2: library part DR125-2R2-R, "FIXED IND 2.2UH 10.9A 4.5 MOHM", Case/Package=Nonstandard, Current Rating=10.9A, DC Resistance (DCR)=4.5mR, Inductance=2.2uH, Inductance Tolerance=20%, Manufacturer="Eaton Cooper", Max Operating Temperature=125°C, Min Operating Temperature=-40°C, Package Quantity=600, Resistor Type=Wirewound, Saturation Current=15A, Self Resonant Frequency=100kHz, Supplier Part Number 1=513-1662-1-ND, Category="Fixed Inductors", ComponentLink1Description=https://datasheet.ciiva.com/14667/0900766b8116a153-14667792.pdf?src-supplier=RSComponents, ComponentLink1URL=https://datasheet.ciiva.com/14667/0900766b8116a153-14667792.pdf?src-supplier=RSComponents, ComponentLink2Description=https://datasheet.ciiva.com/26926/getdatasheetpartid-571249-26926912.pdf?src-supplier=Verical, ComponentLink2URL=https://datasheet.ciiva.com/26926/getdatasheetpartid-571249-26926912.pdf?src-supplier=Verical, ComponentLink3Description=https://datasheet.ciiva.com/8004/87246-8004874.pdf?src-supplier=Element14, ComponentLink3URL=https://datasheet.ciiva.com/8004/87246-8004874.pdf?src-supplier=Element14, Core Material=Ferrite, DC Current=10.9A, Depth=12.5mm, Height=6mm, Height - Seated (Max)=0.236inch, Lead Free="Lead Free", Length=12.5mm, Manufacturer Part Number=DR125-2R2-R, Max DC Current=10.9A, Military Standard=Not, Mount="Surface Mount", Number of Pins=2, Packaging="Tape and Reel", Pricing 1="1=1.46000, 10=1.35100, 25=1.24720, 50=1.03960, 100=0.97710, 250=0.87320 (USD)", Radiation Hardening=No, Rated Current-Max=10.9A, REACH SVHC="No SVHC", RMS Current (Irms)=10.9A, RoHS=Yes, RoHS Compliant=Yes, Series=DR, Shielding=Shielded, Stock 1=1, Supplier 1=Digi-Key, Termination=SMD/SMT, Test Frequency=100kHz, Tolerance=20%, Weight=0.144oz, Width=0.492inch
Q1 Q2: "VISHAY         SI4816BDY-T1-E3             MOSFET, DUAL N CHANNEL, 30V, 0.0093OHM, 8.2A, SOIC-8, FULL REEL", Case/Package=SO, Continuous Drain Current (ID)=8.2A, Drain to Source Resistance=11.5mR, Drain to Source Voltage (Vdss)=30V, Drain-source On Resistance-Max=18.5mR, Gate to Source Voltage (Vgs)=20V, Manufacturer="Vishay Siliconix", Max Operating Temperature=150°C, Max Power Dissipation=1.25W, Min Operating Temperature=-55°C, Package Quantity=1, Supplier Part Number 1=SI4816BDY-T1-E3CT-ND, Threshold Voltage=1V, Category=MOSFETs, ComponentLink1Description=https://datasheet.ciiva.com/15137/getdatasheetpartid-99188-15137841.pdf?src-supplier=Verical, ComponentLink1URL=https://datasheet.ciiva.com/15137/getdatasheetpartid-99188-15137841.pdf?src-supplier=Verical, ComponentLink2Description=https://datasheet.ciiva.com/7710/si4816bd-7710449.pdf?src-supplier=Element14, ComponentLink2URL=https://datasheet.ciiva.com/7710/si4816bd-7710449.pdf?src-supplier=Element14, ComponentLink3Description=https://datasheet.ciiva.com/26789/si4816bdy-t1-e3-26789112.pdf?src-supplier=IIIC, ComponentLink3URL=https://datasheet.ciiva.com/26789/si4816bdy-t1-e3-26789112.pdf?src-supplier=IIIC, ComponentLink4Description=https://datasheet.ciiva.com/928/si4816bd-928458.pdf?src-supplier=Digi-Key, ComponentLink4URL=https://datasheet.ciiva.com/928/si4816bd-928458.pdf?src-supplier=Digi-Key, ComponentLink5Description=https://datasheet.ciiva.com/928/si4816bd-928459.pdf?src-supplier=Digi-Key, ComponentLink5URL=https://datasheet.ciiva.com/928/si4816bd-928459.pdf?src-supplier=Digi-Key, ComponentLink6Description=https://datasheet.ciiva.com/928/si4816bd-928460.pdf?src-supplier=Digi-Key, ComponentLink6URL=https://datasheet.ciiva.com/928/si4816bd-928460.pdf?src-supplier=Digi-Key, ComponentLink7Description=https://datasheet.ciiva.com/11161/si4816bd-11161496.pdf?src-supplier=Avnet, ComponentLink7URL=https://datasheet.ciiva.com/11161/si4816bd-11161496.pdf?src-supplier=Avnet, ComponentLink8Description=https://datasheet.ciiva.com/26136/si4816bd-26136990.pdf?src-supplier=Avnet+Europe, ComponentLink8URL=https://datasheet.ciiva.com/26136/si4816bd-26136990.pdf?src-supplier=Avnet+Europe, ComponentLink9Description=https://datasheet.ciiva.com/16486/si4816bd-16486349.pdf?src-supplier=Future+Electronics, ComponentLink9URL=https://datasheet.ciiva.com/16486/si4816bd-16486349.pdf?src-supplier=Future+Electronics, ComponentLink10Description=https://datasheet.ciiva.com/18448/70026226-18448822.pdf?src-supplier=Allied+Electronics, ComponentLink10URL=https://datasheet.ciiva.com/18448/70026226-18448822.pdf?src-supplier=Allied+Electronics, Element Configuration=Single, Fall Time=9ns, FET Type="2 N-Channel", Height=1.55mm, Lead Free="Lead Free", Length=5mm, Manufacturer Part Number=SI4816BDY-T1-E3, Mount="Surface Mount", Nominal Vgs=3V, Number of Channels=2, Number of Elements=2, Number of Pins=8, On-State Resistance=18.5mR, Packaging="Tape and Reel", Polarity=N-CHANNEL, Pricing 1="1=1.72000, 10=1.54500, 100=1.24180, 500=1.02024, 1000=0.87450 (USD)", Radiation Hardening=No, Rds On Max=18.5mR, REACH SVHC=Unknown, Rise Time=9ns, RoHS=Yes, RoHS Compliant=Yes, Series="LITTLE FOOT®", Stock 1=228, Supplier 1=Digi-Key, Turn-Off Delay Time=31ns, Turn-On Delay Time=13ns, Weight=0.006596oz, Width=4mm
R1 R2 R9 R16: library part AC0805JR-070RL, "Fixed Resistor, Metal Glaze/thick Film, 0.125W, 0ohm, Surface Mount, 0805", Case Code (Imperial)=0805, Case Code (Metric)=2012, Manufacturer=Yageo, Max Operating Temperature=155°C, Max Power Dissipation=125mW, Min Operating Temperature=-55°C, Resistor Type="Thick Film", Supplier Part Number 1=1978210P, Temperature Coefficient=200ppm/°C, Tolerance=5%, Voltage Rating=150V, Case/Package=0805, Category="Chip SMD Resistors", ComponentLink1Description=http://www.yageo.com/NewPortal/yageodocoutput?fileName=/pdf/R-Chip/PYu-AC_51_RoHS_L_6.pdf&src-supplier=Digi-Key, ComponentLink1URL=http://www.yageo.com/NewPortal/yageodocoutput?fileName=/pdf/R-Chip/PYu-AC_51_RoHS_L_6.pdf&src-supplier=Digi-Key, ComponentLink2Description=http://www.yageo.com/documents/recent/PYu-AC_51_RoHS_L_2.pdf?src-supplier=Mouser, ComponentLink2URL=http://www.yageo.com/documents/recent/PYu-AC_51_RoHS_L_2.pdf?src-supplier=Mouser, Features="Moisture Resistant,Automotive AEC-Q200", Height=0.024inch, Lead Free="Lead Free", Length=0.079inch, Manufacturer Part Number=AC0805JR-070RL, Number of Terminations=2, Packaging="Tape and Reel", Power Rating=125mW, Pricing 1="2500=0.00800 (GBP)", Resistance=0R, RoHS=Yes, Series=AC, Stock 1=77000, Supplier 1=RSComponents, Termination=SMD/SMT, Width=1.25mm
R3: library part AC0805FR-0710RL, "Res Thick Film 0805 10 Ohm 1% 0.125W(1/8W) ±200ppm/C Pad SMD Automotive T/R", Case Code (Imperial)=0805, Case Code (Metric)=2012, Manufacturer=Yageo, Max Operating Temperature=155°C, Max Power Dissipation=125mW, Min Operating Temperature=-55°C, Resistor Type="Thick Film", Supplier Part Number 1=YAG3690CT-ND, Temperature Coefficient=200ppm/°C, Tolerance=1%, Voltage Rating=150V, Case/Package=0805, Category="Chip SMD Resistors", ComponentLink1Description=http://www.mouser.com/ds/2/447/yageodocoutput-1111992.pdf?src-supplier=Mouser, ComponentLink1URL=http://www.mouser.com/ds/2/447/yageodocoutput-1111992.pdf?src-supplier=Mouser, ComponentLink2Description=http://components.arrow.com/part/dataview/0323_03350463?src-supplier=Arrow+Europe, ComponentLink2URL=http://components.arrow.com/part/dataview/0323_03350463?src-supplier=Arrow+Europe, ComponentLink3Description=http://www.yageo.com/NewPortal/yageodocoutput?fileName=/pdf/R-Chip/PYu-AC_51_RoHS_L_6.pdf&src-supplier=Digi-Key, ComponentLink3URL=http://www.yageo.com/NewPortal/yageodocoutput?fileName=/pdf/R-Chip/PYu-AC_51_RoHS_L_6.pdf&src-supplier=Digi-Key, ComponentLink4Description=http://www.yageo.com/documents/recent/PYu-AC_51_RoHS_L_2_revised.pdf?src-supplier=Future+Electronics, ComponentLink4URL=http://www.yageo.com/documents/recent/PYu-AC_51_RoHS_L_2_revised.pdf?src-supplier=Future+Electronics, Construction=Rectangular, Depth=1.25mm, Features="Moisture Resistant,Automotive AEC-Q200", Height=0.024inch, Lead Free="Lead Free", Length=2mm, Manufacturer Part Number=AC0805FR-0710RL, Military Standard=Not, Number of Terminations=2, Packaging="Tape and Reel", Power Rating=125mW, Pricing 1="1=0.10000, 10=0.09000, 100=0.03440, 1000=0.01515, 2500=0.01309 (USD)", Resistance=10R, RoHS=Yes, RoHS Compliant=Yes, Series=AC, Size Code=0805, Stock 1=98707, Supplier 1=Digi-Key, Termination=SMD/SMT, Width=1.25mm
R4 R5: library part AC0805FR-071RL, "Res Thick Film 0805 1 Ohm 1% 0.125W(1/8W) ±200ppm/C Pad SMD Automotive T/R", Case Code (Imperial)=0805, Case Code (Metric)=2012, Manufacturer=Yageo, Max Operating Temperature=155°C, Max Power Dissipation=125mW, Min Operating Temperature=-55°C, Resistor Type="Thick Film", Supplier Part Number 1=1978175, Temperature Coefficient=200ppm/°C, Tolerance=1%, Voltage Rating=150V, Case/Package=0805, Category="Chip SMD Resistors", ComponentLink1Description=https://datasheet.ciiva.com/12576/pyu-ac-51-rohs-l-2-12576553.pdf?src-supplier=Mouser, ComponentLink1URL=https://datasheet.ciiva.com/12576/pyu-ac-51-rohs-l-2-12576553.pdf?src-supplier=Mouser, Features="Moisture Resistant,Automotive AEC-Q200", Height=0.024inch, Lead Free="Lead Free", Length=0.079inch, Manufacturer Part Number=AC0805FR-071RL, Number of Terminations=2, Packaging="Tape and Reel", Power Rating=125mW, Pricing 1="500=0.01400, 2500=0.01000 (GBP)", Resistance=1R, RoHS=Yes, RoHS Compliant=Yes, Series=AC, Size Code=0805, Stock 1=2300, Supplier 1=RSComponents, Termination=SMD/SMT, Weight=0.000194oz, Width=0.049inch
R6 R7 R10 R12: library part AC0805FR-07200KL, "Res Thick Film 0805 200K Ohm 1% 0.125W(1/8W) ±100ppm/C Epoxy Pad SMD Automotive T/R", Case Code (Imperial)=0805, Case Code (Metric)=2012, Manufacturer=Yageo, Max Operating Temperature=155°C, Max Power Dissipation=125mW, Min Operating Temperature=-55°C, Package Quantity=5000, Resistance=200kR, Resistor Type="Thick Film", Supplier Part Number 1=YAG3706CT-ND, Temperature Coefficient=100ppm/°C, Tolerance=1%, Voltage Rating=150V, Case/Package=0805, Category="Chip SMD Resistors", ComponentLink1Description=http://www.mouser.com/ds/2/447/yageodocoutput-1111992.pdf?src-supplier=Mouser, ComponentLink1URL=http://www.mouser.com/ds/2/447/yageodocoutput-1111992.pdf?src-supplier=Mouser, ComponentLink2Description=http://www.yageo.com/NewPortal/yageodocoutput?fileName=/pdf/R-Chip/PYu-AC_51_RoHS_L_6.pdf&src-supplier=Digi-Key, ComponentLink2URL=http://www.yageo.com/NewPortal/yageodocoutput?fileName=/pdf/R-Chip/PYu-AC_51_RoHS_L_6.pdf&src-supplier=Digi-Key, ComponentLink3Description=http://www.yageo.com/documents/recent/PYu-AC_51_RoHS_L_2.pdf?src-supplier=Future+Electronics, ComponentLink3URL=http://www.yageo.com/documents/recent/PYu-AC_51_RoHS_L_2.pdf?src-supplier=Future+Electronics, Features="Moisture Resistant,Automotive AEC-Q200", Height=0.5mm, Lead Free="Lead Free", Length=2mm, Manufacturer Part Number=AC0805FR-07200KL, Number of Terminations=2, Packaging="Cut Tape", Power Rating=125mW, Pricing 1="1=0.10000, 10=0.05000, 100=0.02040, 1000=0.00917, 2500=0.00796 (USD)", RoHS=Yes, RoHS Compliant=Yes, Series=AC, Stock 1=8446, Supplier 1=Digi-Key, Technology="THICK FILM", Termination=SMD/SMT, Weight=0.000194oz, Width=1.25mm
R8 R13 R15 R17 R18: library part RES
R11 R14: library part AC0805FR-0710KL, "Res Thick Film 0805 10K Ohm 1% 0.125W(1/8W) ±100ppm/C Pad SMD Automotive T/R", Case Code (Imperial)=0805, Case Code (Metric)=2012, Manufacturer=Yageo, Max Operating Temperature=155°C, Max Power Dissipation=125mW, Min Operating Temperature=-55°C, Package Quantity=1, Resistance=10kR, Resistor Type="Thick Film", Supplier Part Number 1=311-10KLGCT-ND, Temperature Coefficient=100ppm/°C, Tolerance=1%, Voltage Rating=150V, Case/Package=0805, Category="Chip SMD Resistors", ComponentLink1Description=https://datasheet.ciiva.com/5558/pyu-ac-51-rohs-l-2-5558347.pdf?src-supplier=Mouser, ComponentLink1URL=https://datasheet.ciiva.com/5558/pyu-ac-51-rohs-l-2-5558347.pdf?src-supplier=Mouser, Construction=Rectangular, Depth=1.25mm, Features="Moisture Resistant,Automotive AEC-Q200,Anti-Sulfur", Height=0.024inch, Lead Free="Lead Free", Length=0.079inch, Manufacturer Part Number=AC0805FR-0710KL, Military Standard=Not, Number of Terminations=2, Packaging="Tape and Reel", Power Rating=125mW, Pricing 1="1=0.10000, 10=0.05000, 100=0.02040, 1000=0.00917, 2500=0.00796 (USD)", RoHS=Yes, RoHS Compliant=Yes, Series=AC, Size Code=0805, Stock 1=3, Supplier 1=Digi-Key, Termination=SMD/SMT, Width=0.049inch
U1: "IC MAIN PWR CTRLR QUAD 32-QFN", Case/Package=QFN, Manufacturer=Renesas, Max Operating Temperature=100°C, Min Operating Temperature=-40°C, Supplier Part Number 1=ISL6236AIRZ-ND, ComponentLink1Description=http://www.intersil.com/content/dam/Intersil/documents/isl6/isl6236a.pdf?src-supplier=Digi-Key, ComponentLink1URL=http://www.intersil.com/content/dam/Intersil/documents/isl6/isl6236a.pdf?src-supplier=Digi-Key, Manufacturer Part Number=ISL6236AIRZ, Mount="Surface Mount", Number of Outputs=4, Packaging=Rail/Tube, Pricing 1="1=6.46000, 10=5.80200, 25=5.48560, 100=4.75410, 250=4.51032, 500=4.04708, 1000=3.84100 (USD)", RoHS=Yes, RoHS Compliant=Yes, Stock 1=660, Supplier 1=Digi-Key

## Via types
v1: diameter 0.6, hole 0.3, L1 to L6, tented both sides, 102 vias

## Nets (pads, with @x,y where several pads share a name; then routed paths per layer and width w, separated by ;. In a path a pad name is that pad's centre, name@x,y a point inside that pad or via, vN(x,y) a via of type N, cw(c..) or ccw(c..) an arc to the next point about the centre after c; other vN are vias at no path point)
+1V5: C9.1 J3.1 L1.1 R8.2 U1.10 | length 17.4
  L3 w1: v1(30.781,19.081) 37.862,12 v1(39,12)
  L6 w0.2: U1.10 26.25,22.05 26.6,21.7 ; R8.2@29.639,19.111 R8.2
  L6 w0.5: 26.6,21.7 29.15,19.15 29.6,19.15 R8.2@29.639,19.111 ; R8.2 29.731,19.081 v1(30.781,19.081)
+1V05: C10.1 J4.1 L2.2 U1.30 | length 19.4
  L3 w1: v1(25.5,29.7) 26.139,29.7 34.339,37.9 v1(39,37.9)
  L6 w0.2: v1(25.5,29.7) 25.423,29.623 25.423,28.452 25.626,28.25 25.633,28.25 25.75,28.133 U1.30
+5V_LDO: C1.2 R1.2 U1.7 | length 25.3
  L3 w1: v1(12.3,25.1) 19.934,25.1 21.934,23.1 29.462,23.1 v1(30.081,22.481)
  L6 w0.2: U1.7 27.415,23.685 27.815,23.685 28.4,23.1
  L6 w0.5: v1(12.3,25.1) R1.2 ; 28.4,23.1 28.681,22.819 28.681,21.98 29.143,21.518 29.85,21.518 30.05,21.318 C1.2 C1.2@30.05,21.55 ; C1.2@30.081,21.75 v1(30.081,22.481)
+5V_PVCC: C3.2 R1.1 R2.2 R3.1 U1.19 | length 13.2
  L6 w0.2: 21.4,24.25 21.4,24.2 U1.19
  L6 w0.5: C3.2 20.26,25 21.01,24.25 21.4,24.25
  L6 w0.7: R1.1 15.35,26.2 ; R3.1 R2.2 15.35,26.2 ; C3.2 19.25,25.1 19.25,25.79 18.84,26.2 15.35,26.2
+5V_VCC: C4.2 R3.2 R9.2 R10.2 R11.2 R12.2 R14.2 R17.2 U1.2 U1.3 U1.20 | length 16.6
  L6 w0.2: v1(21.349,25.1) 21.749,24.7 U1.20 ; R14.2@22.8,16.95 R14.2@22.974,16.95 ; U1.3 28.5,25.7 28.9,26.1 28.9,27.138 ; U1.2 28,26.2 28.3,26.5 v1(28.3,26.6)
  L6 w0.5: v1(12.3,29.8) R3.2 ; v1(12.3,32.2) R10.2 ; v1(12.3,34.5) R12.2 ; v1(22.8,16.3) R14.2@22.8,16.95 ; v1(27.3,36.2) 27.319,36.181 27.319,35.131 R17.2 ; v1(27.4,16) R9.2 ; 28.9,27.138 29.967,28.206 C4.2@29.967,29.5 ; v1(29,35.3) 29.019,35.281 29.669,35.281 R11.2 ; C4.2 30,29.55 v1(30,30.7)
+REF: C12.1 R15.2 U1.1 | length 9.8
  L6 w0.2: U1.1 27.4,27 27.9,27.5
  L6 w0.5: R15.2 C12.1 29.895,32.745 29.895,31.695 28.6,30.4 28.6,28.2 27.9,27.5
+VIN: C2.2 C5.2 C6.2 J1.1 Q1.8 Q2.8 R2.1 U1.6 | length 5.8
  L6 w0.2: R2.1@13.35,27.4 R2.1 ; U1.6 27.9,24.2 28.4,23.7 28.9,23.7
  L6 w0.5: v1(12.3,27.4) R2.1@13.35,27.4 ; 28.9,23.7 C2.2 30.15,23.9 30.35,24.1 30.4,24.1 v1@31.181,24.881
  other v1: 31.2,24.9
+VREF3: C11.1 R16.2 U1.5 | length 25.2
  L6 w0.2: U1.5 28.285,24.7 28.335,24.65
  L6 w0.5: R16.2 R16.2@27.6,37.4 ; 28.335,24.65 29.364,24.65 29.95,25.236 29.95,26.05 C11.1@30.1,26.2
  L6 w0.9: R16.2@27.6,37.4 33.5,37.4 34.6,36.3 34.6,28.5 33.5,27.4 31,27.4 30.15,26.55 C11.1
EN1: R14.1 U1.14 | length 4.1
  L6 w0.2: R14.1 22.8,19.7 24.25,21.15 U1.14
"EN LDO": R11.1 U1.4 | length 16.3
  L6 w0.2: U1.4 28.7,25.2 29.381,25.881 29.381,26.841 30.839,28.3 33.039,28.3 33.7,28.961 33.7,34.449 32.949,35.2 R11.1
FB1: R8.1 R9.1 R13.2 U1.11 | length 9.8
  L6 w0.2: U1.11 25.75,21.65 25.8,21.6
  L6 w0.5: 25.8,21.6 25.8,20.35 27.037,19.113 R9.1@27.4,19.113 ; R9.1 27.7,19.05 29.3,17.45 29.3,17.25 29.4,17.15 R13.2
GND: C1.1 C2.1 C3.1 C4.1 C5.1 C6.1 C9.2 C10.2 C11.2 C12.2 J2.1 J5.1 J6.1 Q1.2 Q1.3 Q2.2 Q2.3 R6.2 R7.1 R13.1 R18.1 U1.8 U1.21 U1.22 U1.29 U1.33 | length 14.2
  L6 w0.2: U1.21 U1.33@24.8,25.2 ; U1.22 U1.33@24.2,25.7 ; v1(24.2,25.8) U1.33@24.8,25.2 ; v1(24.5,29.7) 24.5,28.81 25.25,28.06 U1.29 ; U1.33 U1.33@24.8,25.2 ; U1.8 27.4,22.308 27.7,22.008 v1(27.7,21.9) ; R13.1 R13.1@32.05,19.1
  L6 w0.5: v1(24.7,30.8) R6.2 ; v1(25.1,16) R7.1 ; R18.1 v1(28.5,39.7) ; R13.1@32.05,19.1 32.069,19.081 33.081,19.081 v1(33.1,19.1)
  other v1: 9.5,5.5 11,5.5 8.5,7 10,7 9.5,8.5 11,8.5 8.5,10 10,10 9.5,11.5 11,11.5 8.5,13 9.8,13 10.7,14.4 9.5,14.8 10.7,15.6 36.9,18.7 40.3,18.7 14,19.3 14,20.1 36.9,20.5 40.3,20.5 14,20.8 34,20.8 34,21.6 37.7,22 39.5,22 32.9,23.3 17.1,23.9 17.8,23.9 24.2,24.1 25.8,24.1 32.9,24.1 32.9,25.6 25.8,25.8 32.9,26.4 37.7,28 39.5,28 32.7,29.1 9.5,29.5 11,29.5 36.9,29.5 40.3,29.5 32.7,29.9 8.5,31 10,31 36.9,31.3 40.3,31.3 31.5,31.7 32.2,31.7 9.5,32.5 11,32.5 8.5,34 10,34 9.5,35.5 11,35.5 8.5,37 9.9,37 10.7,38.4 9.5,38.8 10.7,39.6 19.4,43.2 19.4,44.1 19.4,45
LGATE1: Q1.4 U1.18 | length 21.4
  L1 w0.5: Q1.4@12.173,13.095 12.176,13.097 13.297,13.097 v1(13.3,13.1)
  L3 w1: v1(13.3,13.1) 13.29,13.1 12.046,14.344 12.046,21.246 13.7,22.9 v1(20.4,22.9)
  L6 w0.2: v1(20.4,22.9) 20.477,22.977 20.985,22.977 21.708,23.7 U1.18
LGATE2: Q2.4 U1.23 | length 18.3
  L1 w0.5: Q2.4@12.173,37.095 v1@13.195,37.095
  L3 w1: v1(13.3,37.09) 14.3,36.09 14.3,30.5 17.9,26.9 19.9,26.9 v1(20.8,26)
  L6 w0.2: v1(20.8,26) 21.408,26 21.608,26.2 U1.23
NetC7_2: C7.2 R4.1 | length 2.4
  L6 w0.2: C7.2 17.45,21.35 17.65,21.55 R4.1
NetC8_1: C8.1 R5.2 | length 2.4
  L6 w0.2: C8.1 17.45,28.686 17.65,28.486 R5.2
NetR4_2: R4.2 U1.17 | length 3.6
  L6 w0.2: R4.2 19.55,22.55 19.8,22.3 21.38,22.3 22.265,23.185 22.585,23.185 U1.17
NetR5_1: R5.1 U1.24 | length 3.3
  L6 w0.2: R5.1 20.8,27.4 21.5,26.7 U1.24
NetR6_1: R6.1 U1.31 | length 1.6
  L6 w0.2: U1.31 26.265,27.365 26.265,27.765 26.4,27.9 R6.1
NetR7_2: R7.2 U1.12 | length 3.6
  L6 w0.2: R7.2 25.1,20.534 25.25,20.684 U1.12
PHASE1: C7.1 L1.2 Q1.5 Q1.6 Q1.7 U1.16 | length 12.4
  L3 w1: v1(19,13.1) 19.4,13.5 v1(19.4,18.5)
  L6 w0.2: C7.1 19.4,20.25 v1(19.4,18.5) ; 22.729,22.06 23.118,22.06 23.235,22.177 23.235,22.535 U1.16
  L6 w0.5: C7.1 20.6,20.3 ; 20.602,20.3 22.362,22.06 22.729,22.06
PHASE2: C8.2 L2.1 Q2.5 Q2.6 Q2.7 U1.25 | length 12.6
  L3 w1: v1(19,37.1) 19.3,36.8 v1@19.3,31.217
  L6 w0.2: C8.2@19.3,29.75 C8.2 ; 22.6,27.8 23.118,27.8 23.235,27.683 23.235,27.365 U1.25
  L6 w0.5: C8.2@19.3,29.75 v1(19.3,31.2) ; C8.2 19.468,29.582 20.257,29.582 22.039,27.8 22.6,27.8
POK1: R10.1 U1.13 U1.27 | length 36.8
  L3 w0.2: v1(22.8,30.5) 23.545,29.755 23.545,29.707 24.159,29.093 24.159,28.482 25.441,27.2 29.749,27.2 31.8,25.149 31.8,22.7 29.4,20.3 v1(24.3,20.3)
  L6 w0.2: R10.1 21.2,32.2 v1@22.8,30.6 ; v1(22.8,30.5) 22.8,29.379 24.25,27.929 U1.27 ; v1(24.3,20.3) 24.75,20.75 U1.13
POK2: R12.1 U1.28 | length 14
  L6 w0.2: R12.1 20.449,34.5 23.9,31.049 23.9,28.844 24.75,27.994 U1.28
REFIN2: R15.1 R16.1 R17.1 R18.2 U1.32 | length 14.7
  L6 w0.2: U1.32 26.75,27.59 27.069,27.91 27.09,27.91
  L6 w0.4: R18.2 R16.1 R17.1 R15.1 25.45,31.717 25.567,31.6 27.316,31.6 27.65,31.266 27.65,28.469 27.09,27.91
UGATE1: Q1.1 U1.15 | length 14.5
  L1 w0.5: Q1.1@12.173,16.905 12.176,16.903 13.397,16.903 v1(13.4,16.9)
  L3 w1: v1(13.4,16.9) 14.2,16.9 18.4,21.1 v1(23.3,21.1)
  L6 w0.2: v1(23.3,21.1) 23.75,21.55 U1.15
UGATE2: Q2.1 U1.26 | length 25.5
  L1 w0.5: v1(10.2,40.9) 10.202,40.902 12.17,40.902 Q2.1@12.173,40.905
  L3 w1: v1(10.2,40.9) 10.21,40.91 13.99,40.91 16.214,38.686 16.214,31.686 18.8,29.1 v1(21.9,29.1)
  L6 w0.2: v1(21.9,29.1) 22.5,29.1 23.75,27.85 U1.26
pads on no net: U1.9

## Polygon pours and split planes (outlines as drawn)
GND on L6 "GND_L06_P037" (solid, pour order 37): 16.8,23.5 18.1,23.5 18.1,25.8 16.8,25.8
GND on L6 "GND_L06_P036" (solid, pour order 36): 34.4,22.1 34.4,20.3 32.6,20.3 32.6,22.1
GND on L6 "GND_L06_P035" (solid, pour order 35): 33.3,24.4 33.3,23 31.5,23 31.5,24.4
GND on L6 "GND_L06_P033" (solid, pour order 33): 33.3,26.7 33.3,25.3 31.5,25.3 31.5,26.7
GND on L6 "GND_L06_P032" (solid, pour order 32): 33.1,30.2 33.1,28.8 31.3,28.8 31.3,30.2
GND on L6 "GND_L06_P031" (solid, pour order 31): 31.2,31.3 32.5,31.3 32.5,33.6 31.2,33.6
GND on L1 "GND_L01_P040" (solid, pour order 40): 13.1,40.2 9.7,40.2 8,38.5 8,37.5 8,29 11.5,29 11.5,36.4 10.725,36.4 10.4,36.66 10.4,37.5 10.7,37.8 13.1,37.8
GND on L1 "GND_L01_P043" (solid, pour order 43): 13.1,16.2 9.7,16.2 8,14.5 8,13.5 8,5 11.5,5 11.5,12.4 10.725,12.4 10.4,12.66 10.4,13.5 10.7,13.8 13.1,13.8
+VIN on L1 "+VIN_L01_P015" (solid, pour order 15): 11,42 14,42 14.5,41.5 15.5,40.5 18.7,40.5 18.7,41.5 17,41.5 17,45.5 8.945,45.5 2.5,38.935 2.5,27 3.5,26 12,26 16.3,21.7 16.3,16.4 19,16.4 19,22 15,26 15,26.5 28.5,26.5 31,24 32,24 32,27.5 31,28.5 7.5,28.5 8,28.5 7.5,29 7.5,38.5
GND on L1 "GND_L01_P030" (solid, pour order 30): 40.7,17.6 36.5,17.6 36.5,22.4 40.7,22.4
GND on L1 "GND_L01_P028" (solid, pour order 28): 36.5,32.4 40.7,32.4 40.7,27.6 36.5,27.6
GND on L1 "GND_L01_P027" (solid, pour order 27): 15.6,18.7 13.4,18.7 13.4,21.3 15.6,21.3
GND on L1 "GND_L01_P016" (solid, pour order 16): 17.6,45.4 19.8,45.4 19.8,42.7 17.6,42.7
+1V05 on L1 "+1V05_L01_P013" (solid, pour order 13): 30,33.7 47.1,33.7 47.1,38.7 35.3,38.7 34.5,40.3 30,40.3
+1V5 on L1 "+1V5_L01_P012" (solid, pour order 12): 30.2,16.3 47.1,16.3 47.1,11.3 35.5,11.3 34.3,10.1 30.2,10.1
PHASE1 on L1 "PHASE1_L01_P009" (solid, pour order 9): 16.3,16.1 24.4,16.1 24.4,10.1 18.9,10.1 16.3,12.7
PHASE2 on L1 "PHASE2_L01_P004" (solid, pour order 4): 16.4,40.1 24.1,40.1 24.3,39.9 24.3,34.2 18.8,34.2 16.4,36.6
+5V_VCC on L4 "+5V_VCC_L04_P042" (solid, pour order 42): 10,12.5 32.5,12.5 32.5,40 10,40
GND on L5 (split plane): 49.49,0.51 0.51,0.51 0.51,49.49 49.49,49.49
GND on L2 (split plane): 49.49,0.51 0.51,0.51 0.51,49.49 49.49,49.49

## Other copper
L1:
  text "Kevin Egedy" at 1.254,1.762 h1.52

## Silkscreen, mask and mechanical layers (free items; w line width, h text height)
Top Overlay:
  text "+OUT2" at 40.154,39.054 h1.52
  text "+VIN" at 2.254,32.254 h1.52
  text "GND" at 42.954,26.254 h1.52
  text "GND" at 43.054,22.254 h1.52
  text "GND" at 2.954,16.154 h1.52
  text "+OUT1" at 40.654,9.454 h1.52
Bottom Overlay:
  text "ISL6236A" at 32.65,46.35 h2
  text "1" at 28.4,27.2 h0.9
Top Solder:
  text "Kevin Egedy" at 1.3,1.808 h1.52
Board Outline:
  the board outline again, w0.5

## Text inside footprints (layer, text, board x,y; h text height)
Q1: Top Overlay "1" at 11.2,17.8 h0.9 r270
Q2: Top Overlay "1" at 11.2,41.8 h0.9 r270